# Altium PCB controller_V1.0.PcbDoc (part 1 of 8)
Units mm, origin at the board's own origin, x right, y up, seen from the top; angles counter-clockwise.
Board outline 284.13 x 175.13 mm, 4 copper layers (Top Layer, GND, VCC, Bottom Layer); 496 components, 415 nets, 1682 pads, 750 vias.
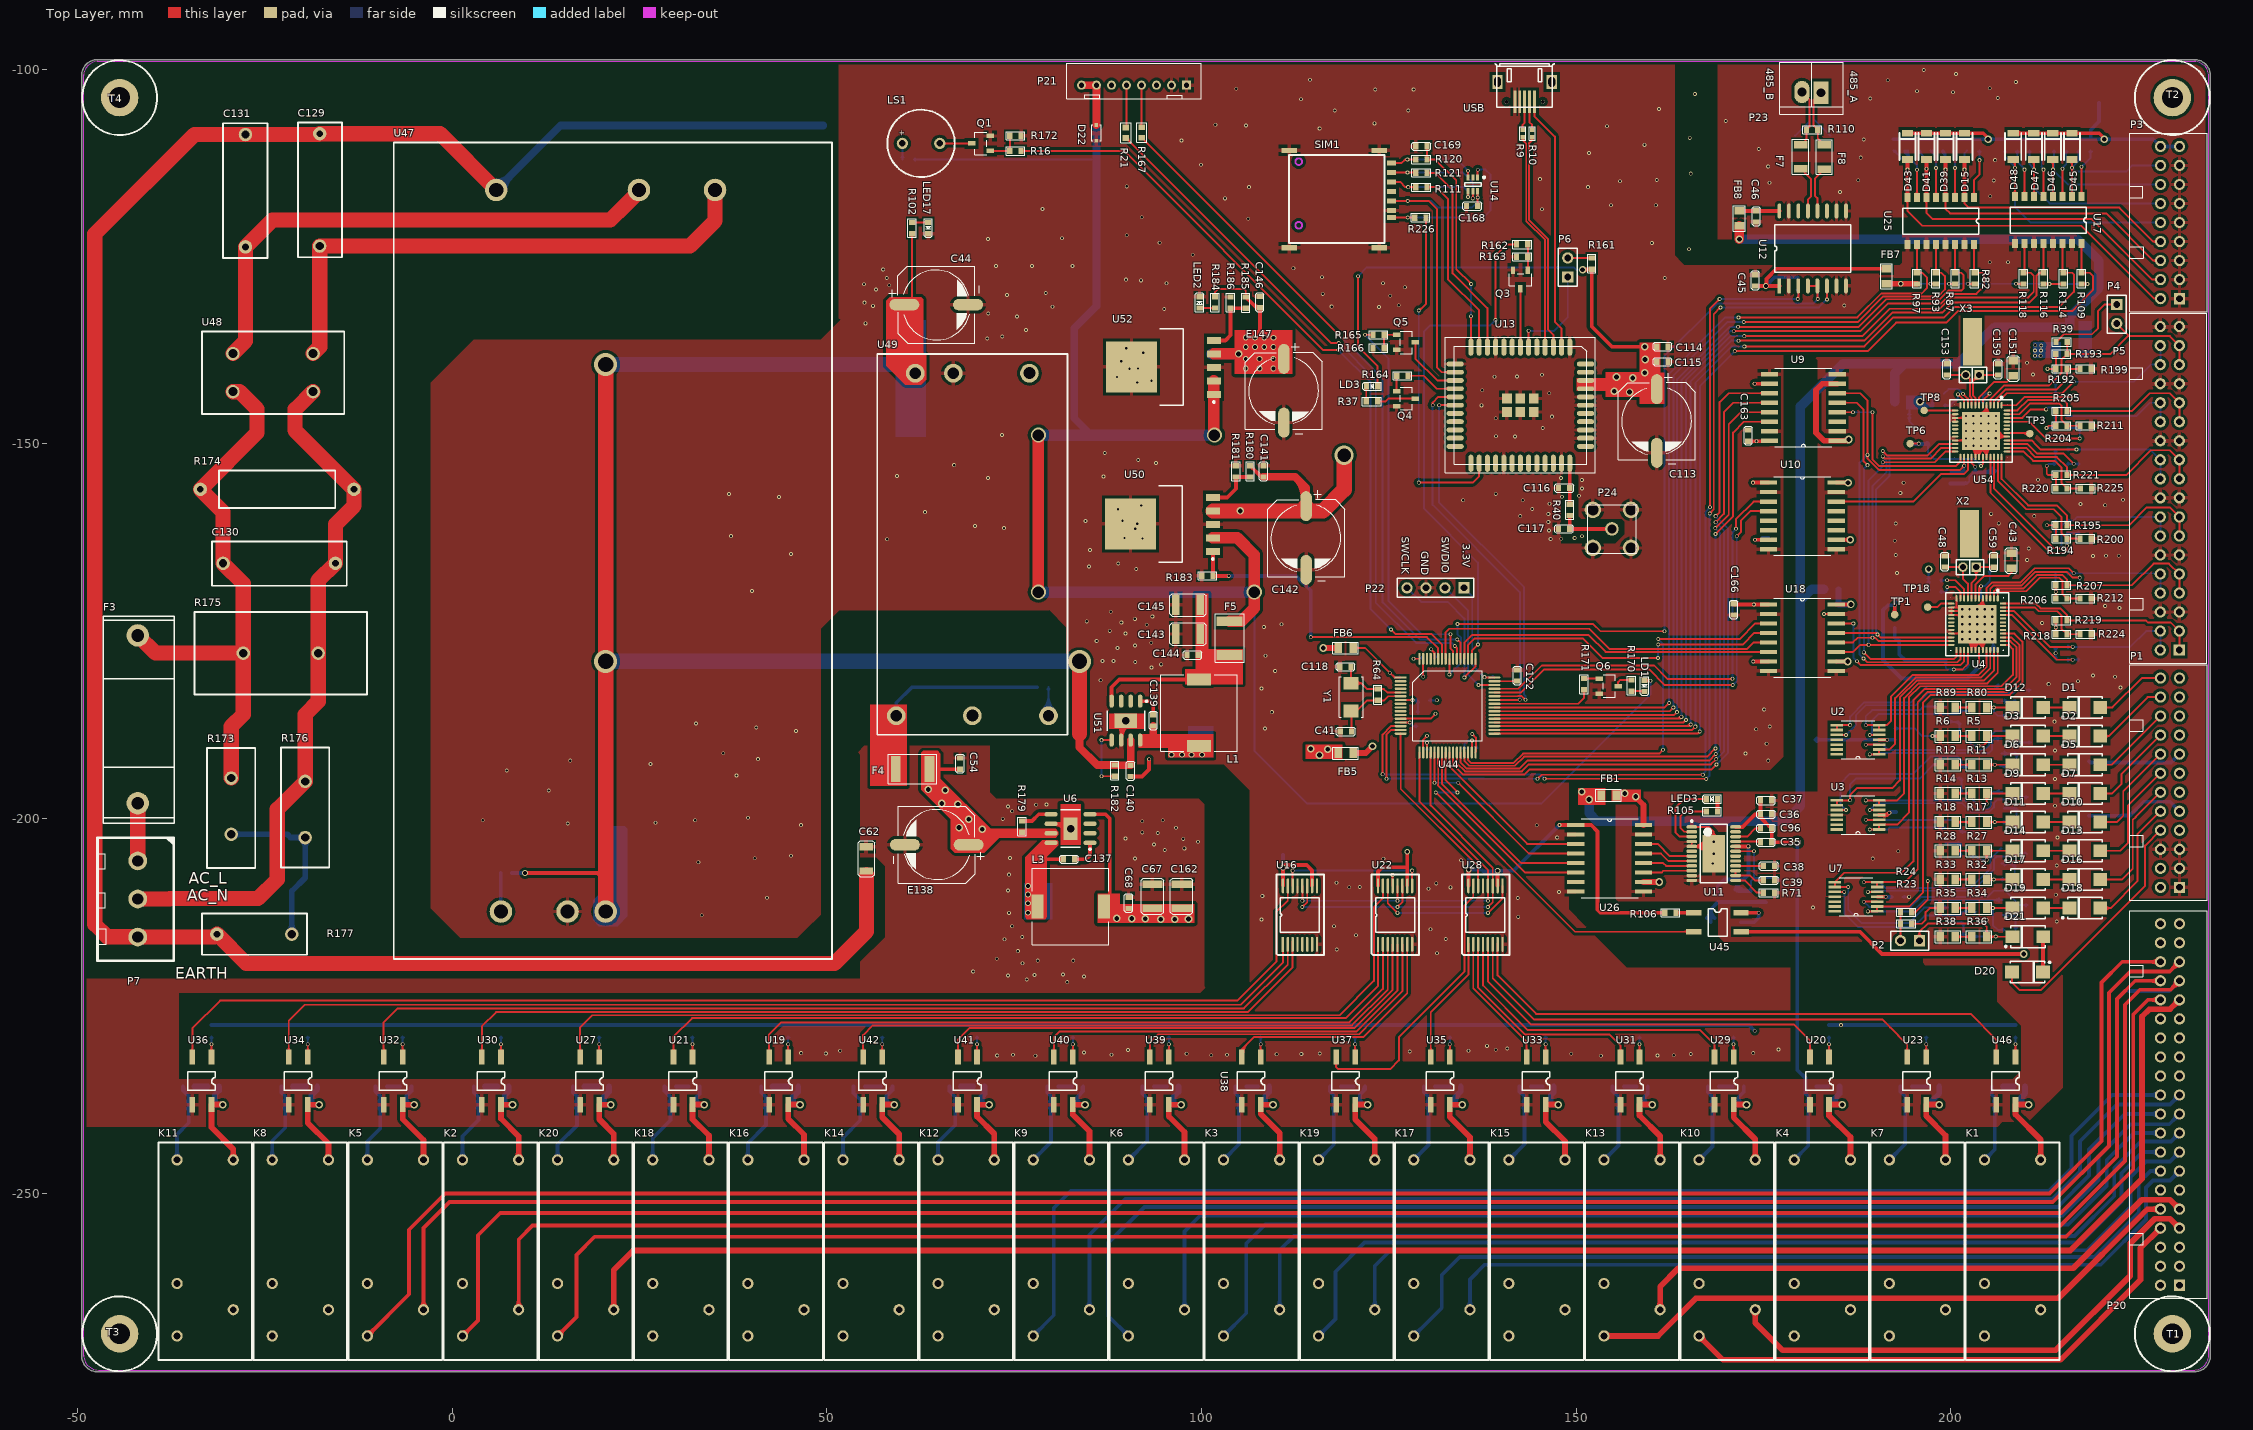
[diagram p0: Top Layer view]
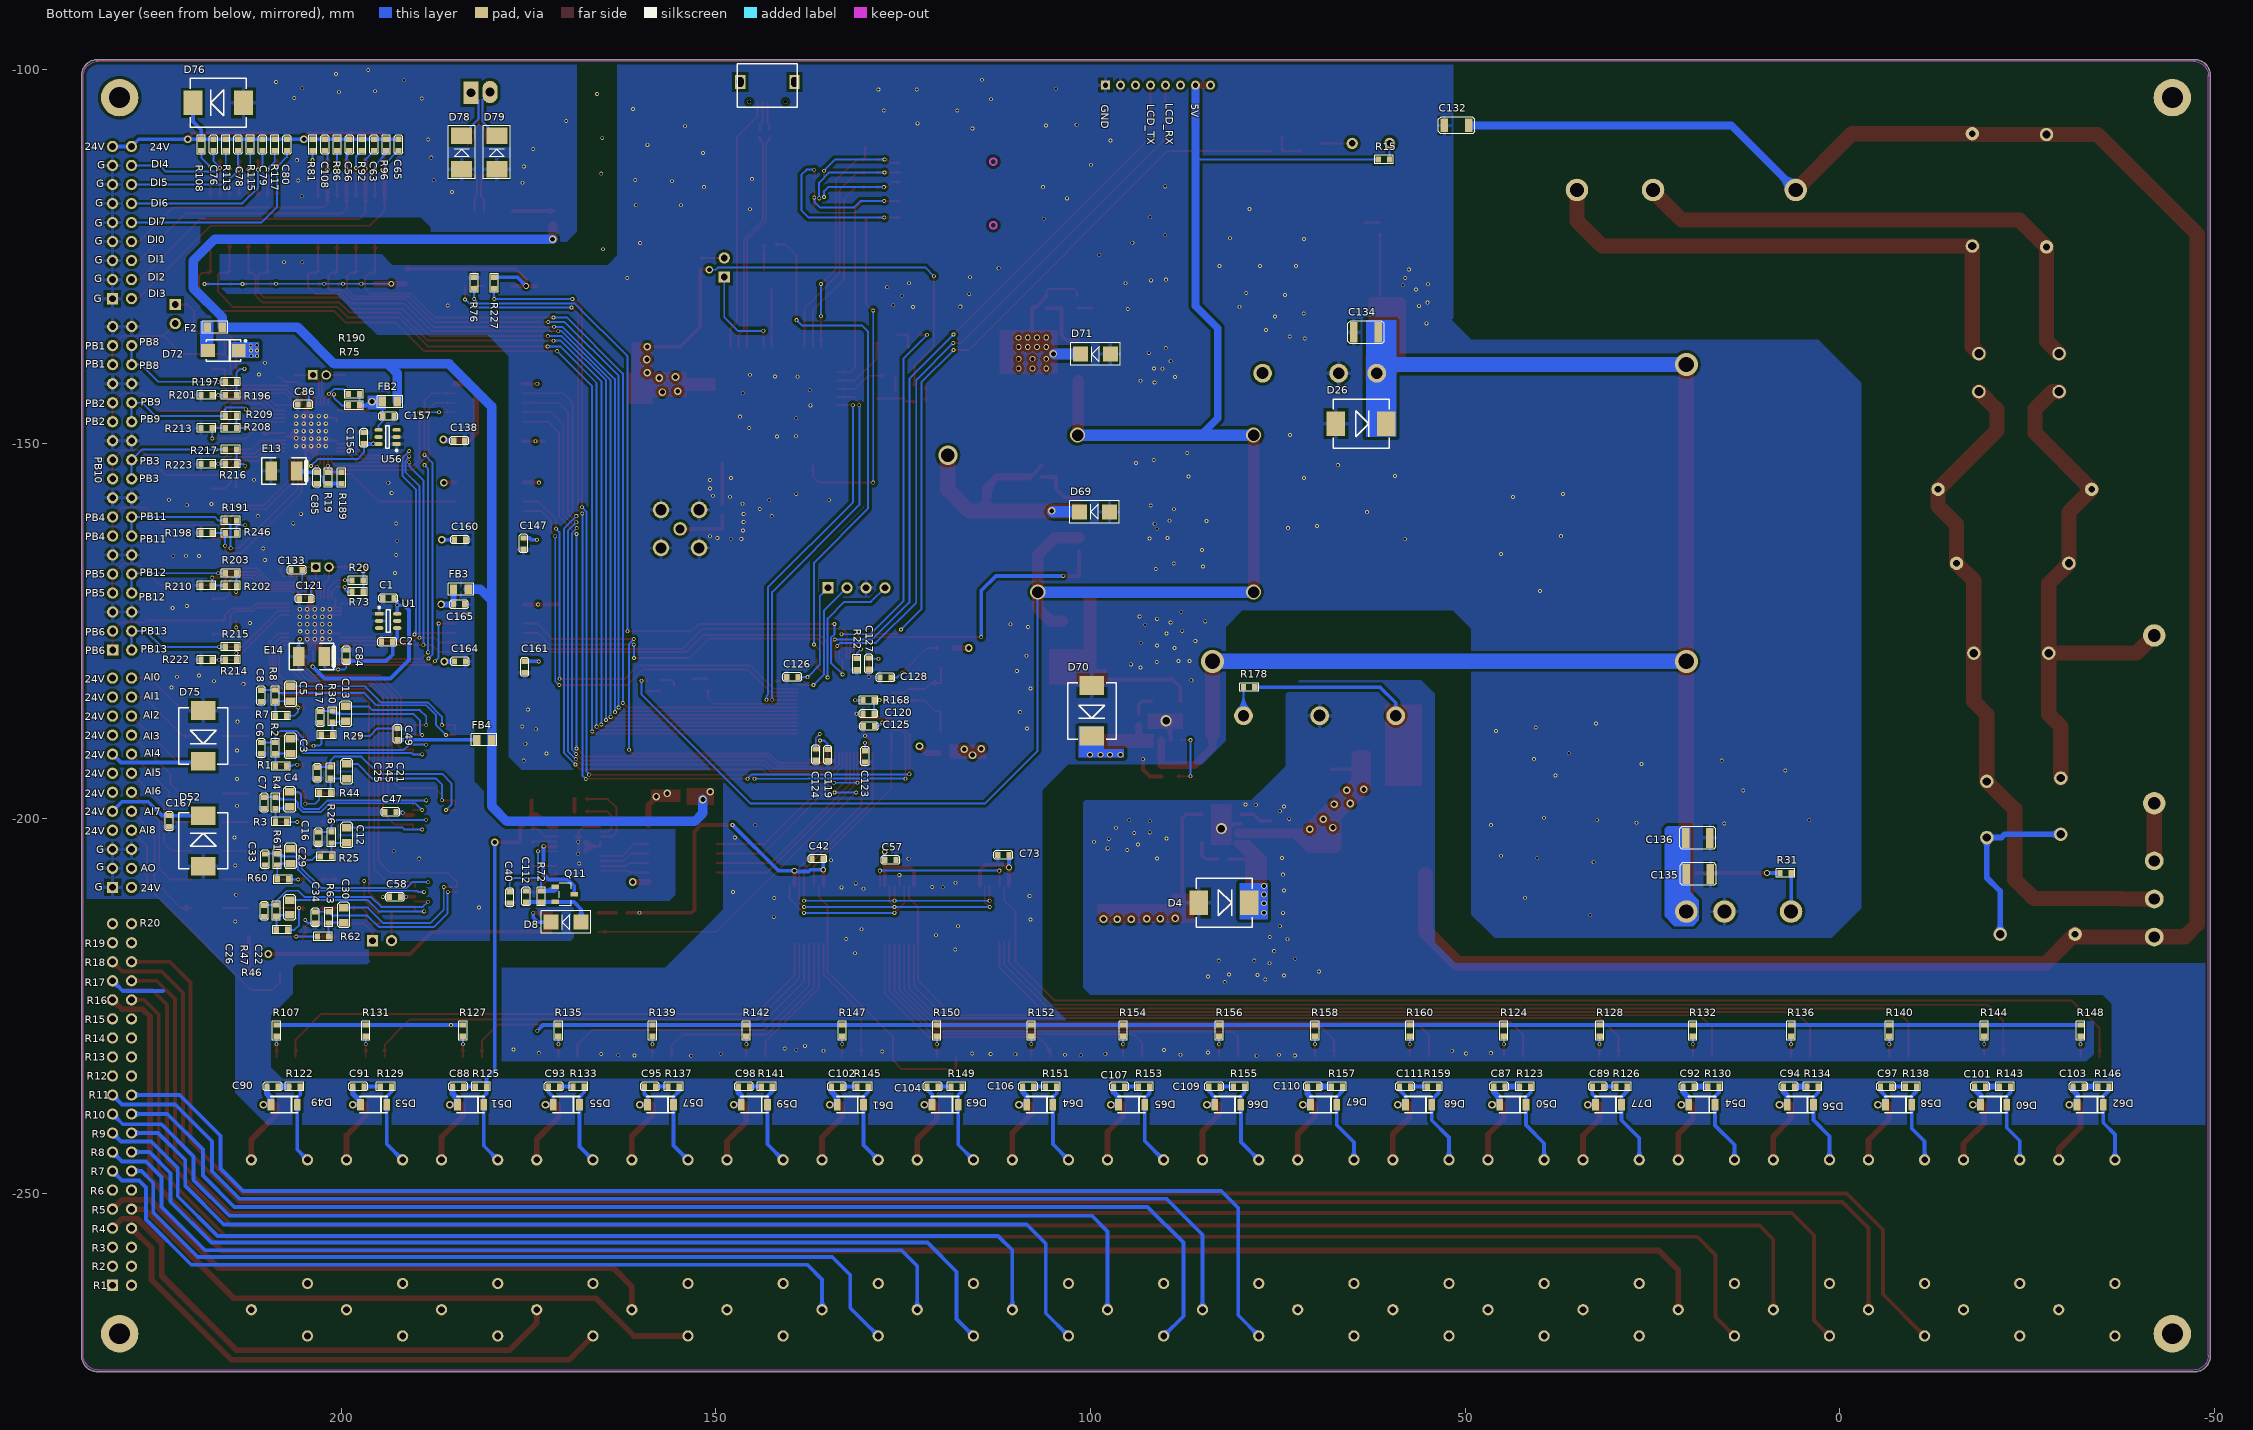
[diagram p1: Bottom Layer view, seen from below]
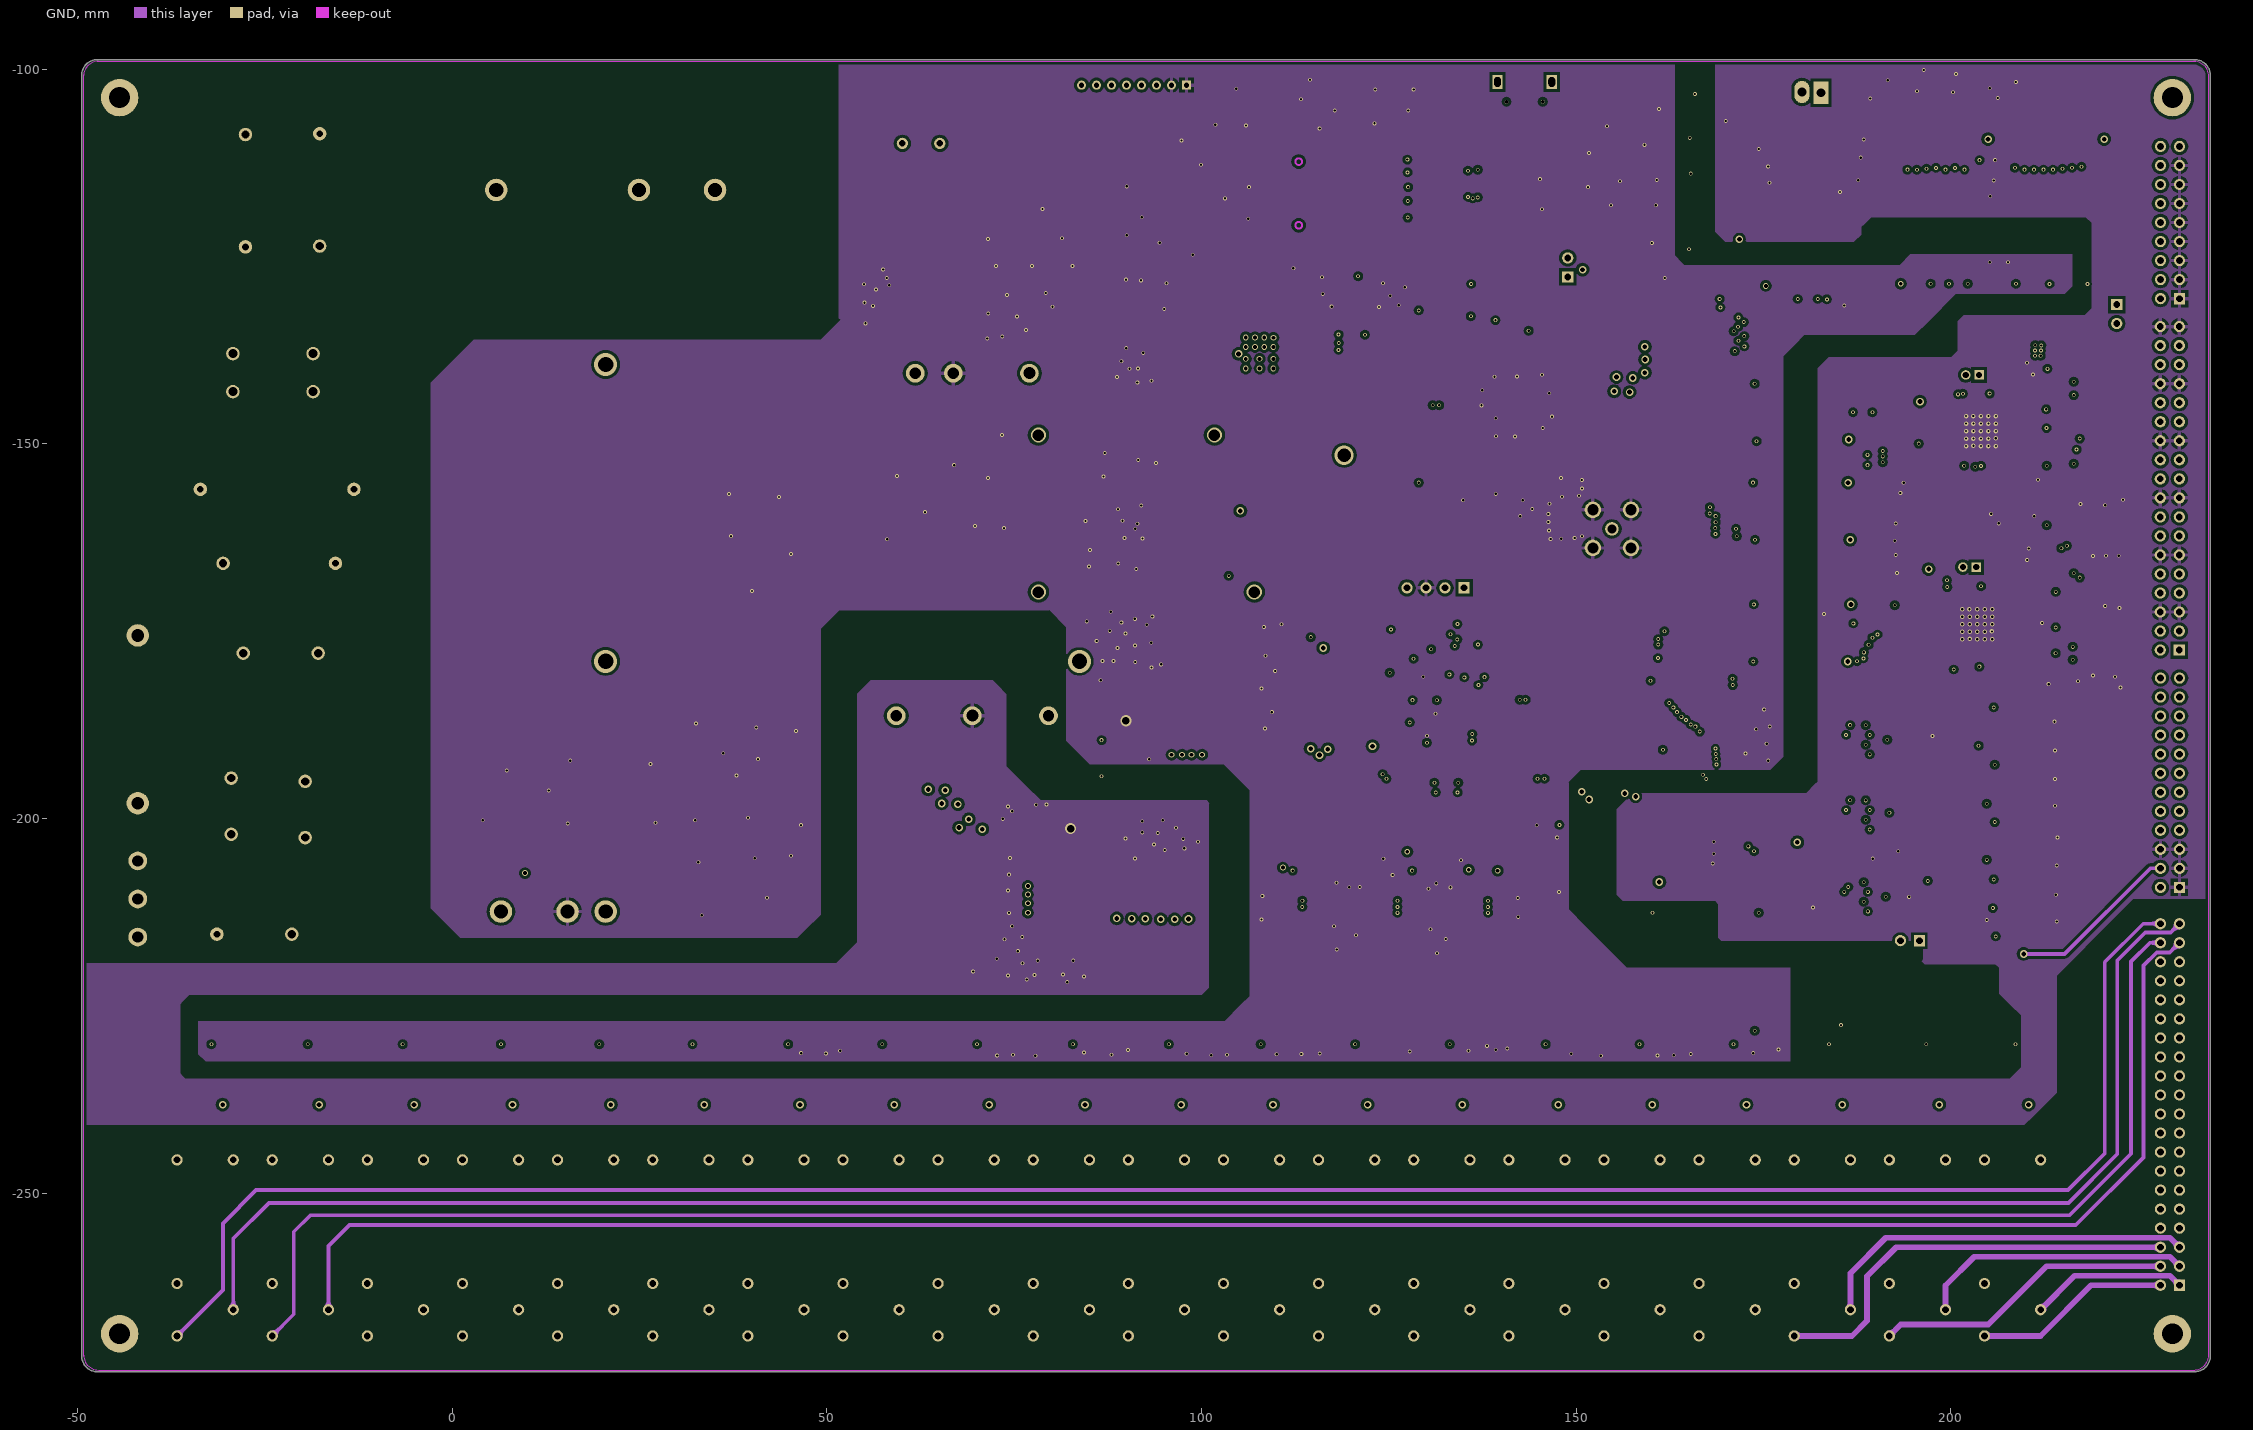
[diagram p2: GND]
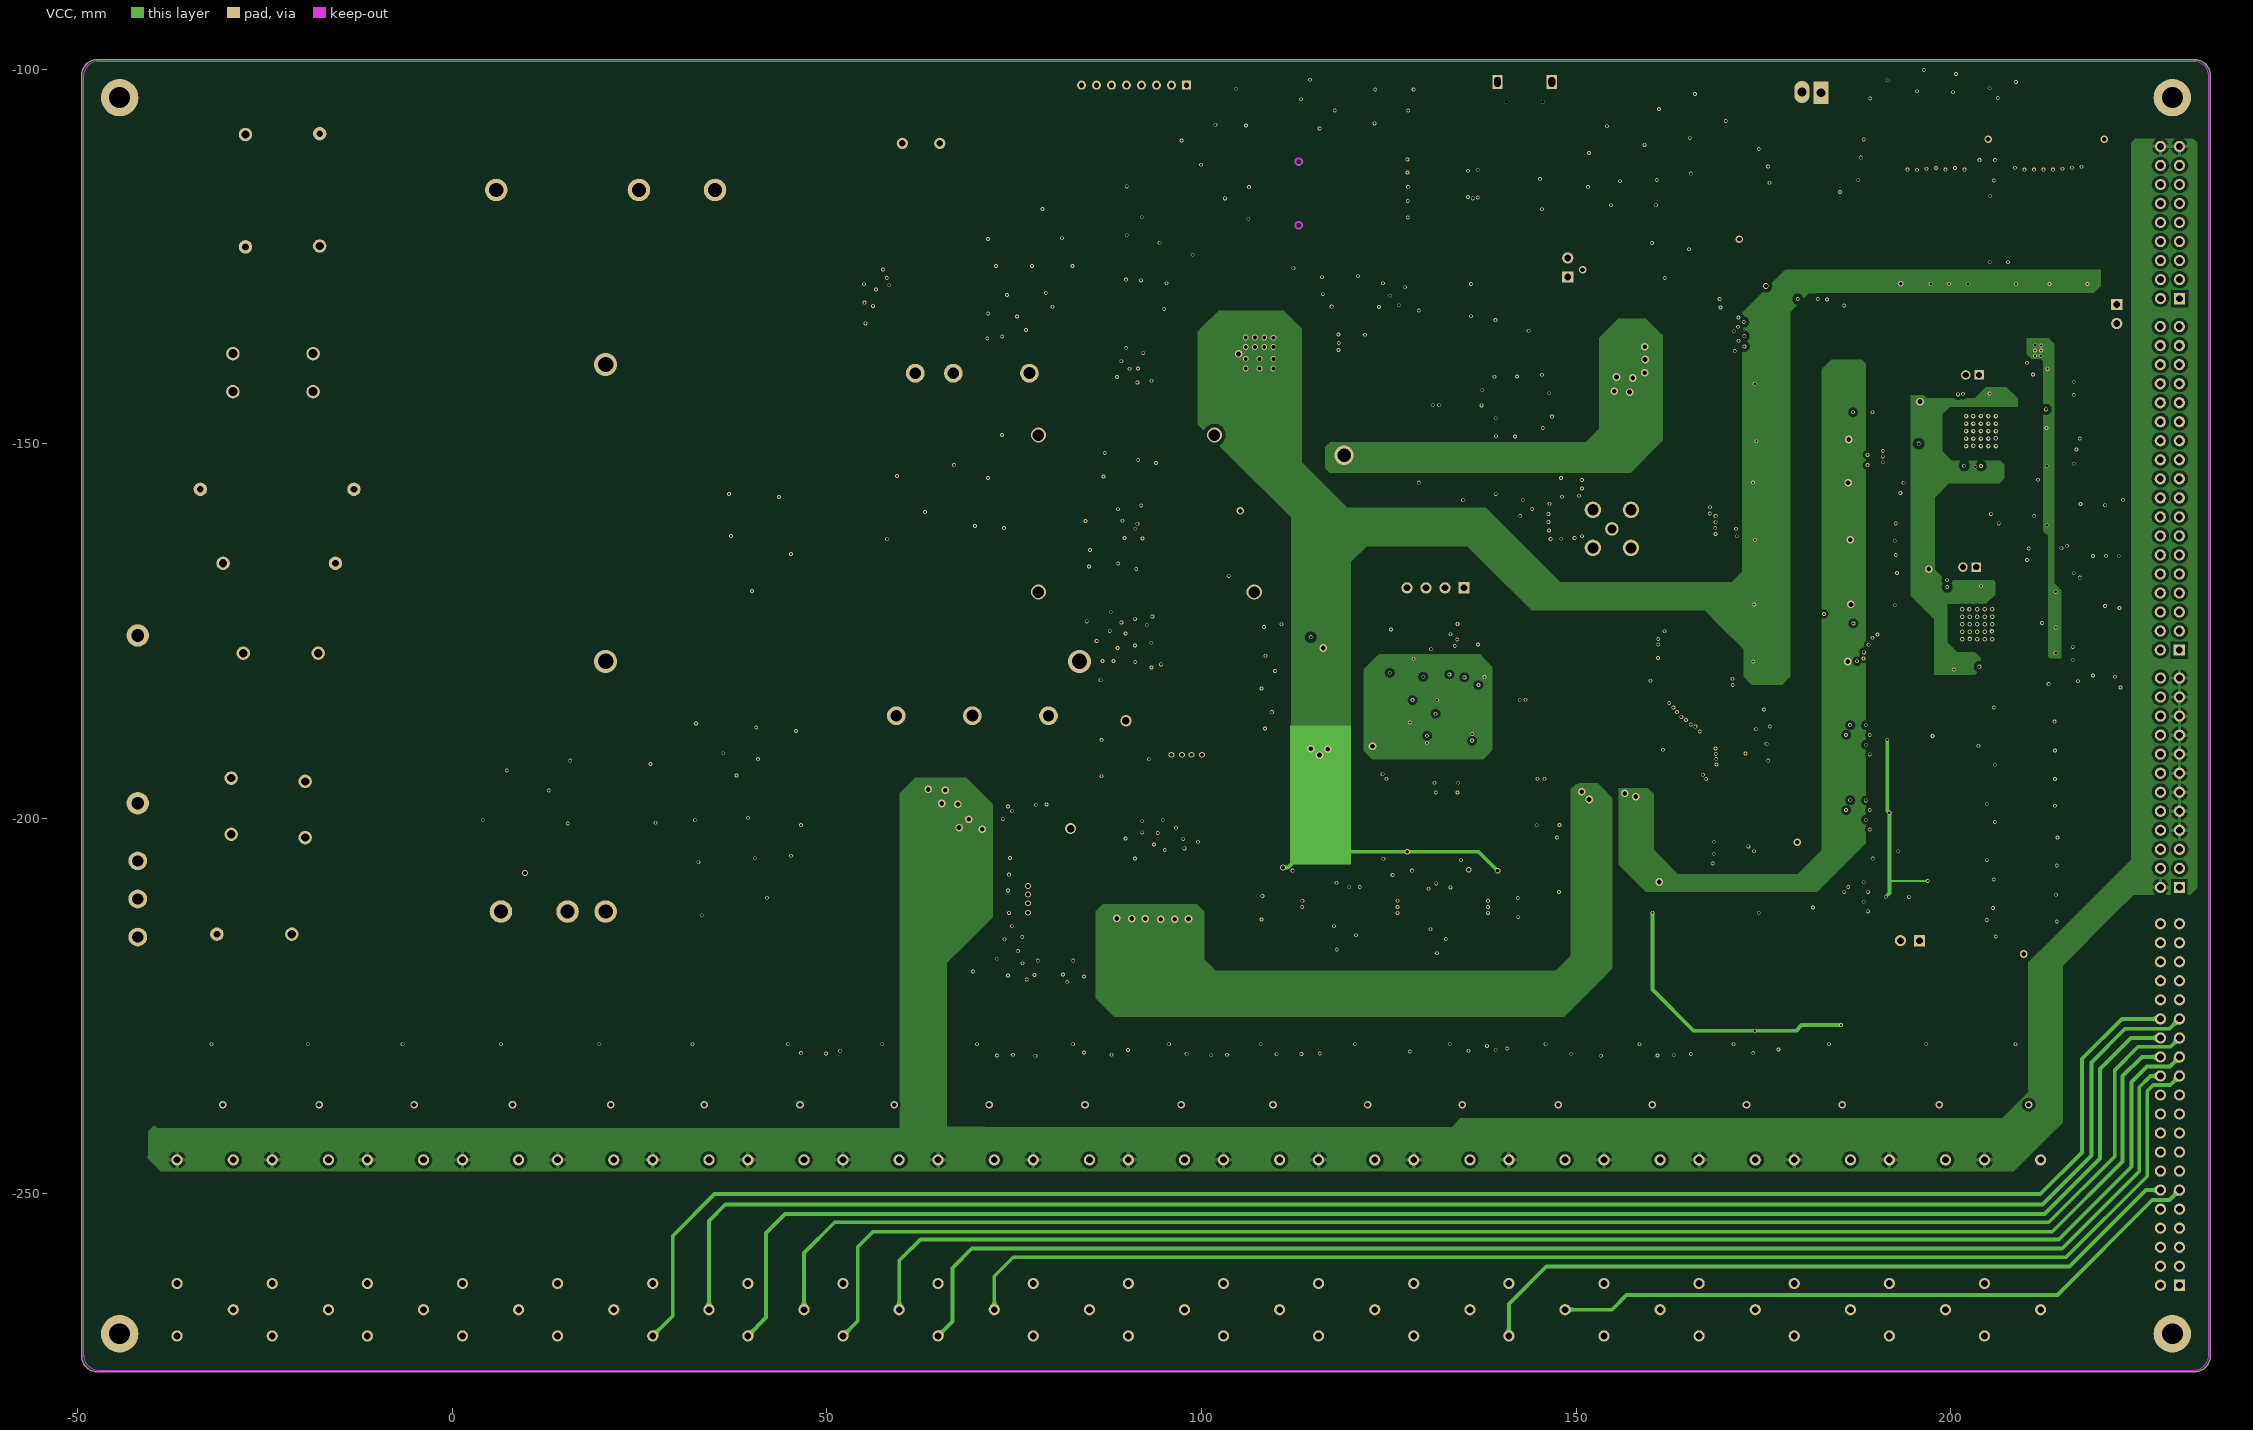
[diagram p3: VCC]

## Layer stack, top to bottom
Top Layer: signal copper 0.0356
Dielectric: core 0.32, FR-4, Dk 4.8
GND: signal copper 0.0356
Dielectric: prepreg 0.32, FR-4, Dk 4.8
VCC: signal copper 0.0356
Dielectric: core 0.32, FR-4, Dk 4.8
Bottom Layer: signal copper 0.0356

## Board outline
-47.678,-273.826 cw(c-47.406,-271.781) -49.469,-271.781 -49.469,-100.762 cw(c-49.406,-100.762) -49.469,-100.758 cw(c-47.406,-100.781) -47.428,-98.717 cw(c-47.424,-98.781) -47.424,-98.717 232.689,-98.717 cw(c232.689,-98.781) 232.709,-98.72 cw(c232.594,-100.781) 234.655,-100.666 cw(c234.594,-100.686) 234.658,-100.686 234.658,-271.781 cw(c232.594,-271.781) 232.594,-273.844 -47.634,-273.844 cw(c-47.634,-273.781)

## Design rules (kind name [scope] priority, off if disabled: settings)
Clearance [InPolygon] p1: gap=0.381
Clearance Clearance_1 [All] p2: gap=0.127
DiffPairsRouting [All] p1: maxlimit=0.254 minlimit=0.254 mostfreqgap=0.254 maxuncoupledlength=12.7
HoleToHoleClearance [All] p1: gap=0.127 allowstackedmicrovias=TRUE
MinimumSolderMaskSliver [All] p1: minsoldermaskwidth=0.127
PolygonConnect PolygonConnect_1 [IsVia] p1: connectstyle=Direct reliefconductorwidth=0.254 reliefentries=4 polygonreliefangle="90 Angle"
PolygonConnect [All] p2: connectstyle=Relief reliefconductorwidth=0.508 reliefentries=4 polygonreliefangle="90 Angle"
RoutingVias [All] p1: holewidth=0.254 width=0.508 viastyle="Through Hole" minholewidth=0.254 minwidth=0.508 maxholewidth=2.54 maxwidth=5.08
SilkToSilkClearance [All] p1: silktosilkclearance=0.127
SilkscreenOverComponentPads [All] p1: minsilkscreentomaskgap=0
SolderMaskExpansion [All] p1: expansion=0.102
Width [All] p1: maxlimit=5.08 minlimit=0.254 preferedwidth=0.254
23 further rules are at their usual default settings.

## Classes and differential pairs
component class rs485: C45 C46 D78 D79 F7 F8 FB7 FB8 P23 R76 R110 R227 U12
component class relay: K1 K2 K3 K4 K5 K6 K7 K8 K9 K10 K11 K12 K13 K14 K15 K16 K17 K18 K19 K20 P20
component class pt100: C151 C153 C156 C157 C159 D72 F2 P4 P5 R39 R75 R189 R190 R191 R192 R193 R194 R195 R196 R197 R198 R199 R200 R201 R202 R203 R204 R205 R206 R207 R208 R209 R210 R211 R212 R213 R214 R215 R216 R217 R218 R219 R220 R221 R222 R223 R224 R225 R246 TP3 TP6 TP8 U54 U56 X3
component class power: C44 C54 C62 C67 C68 C129 C130 C131 C132 C134 C135 C136 C137 C139 C140 C141 C142 C143 C144 C145 C146 C162 D4 D26 D69 D70 D71 E138 E147 F3 F4 F5 L1 L3 LED2 LED17 P7 R31 R102 R173 R174 R175 R176 R177 R178 R179 R180 R181 R182 R183 R184 R185 R186 T1 T2 T3 T4 U6 U47 U48 U49 U50 U51 U52
component class mcu: C41 C118 C119 C120 C122 C123 C124 C125 C126 C127 C128 D22 FB5 FB6 LD1 LS1 P21 P22 Q1 Q6 R15 R16 R21 R22 R64 R167 R168 R170 R171 R172 U44 Y1
component class LTE: C113 C114 C115 C116 C117 C168 C169 LD3 P6 P24 Q3 Q4 Q5 R9 R10 R37 R40 R111 R120 R121 R161 R162 R163 R164 R165 R166 R226 SIM1 U13 U14 USB
component class IO_ctrl: C42 C57 C73 U16 U22 U28
component class do: C87 C88 C89 C90 C91 C92 C93 C94 C95 C97 C98 C101 C102 C103 C104 C106 C107 C109 C110 C111 D49 D50 D51 D53 D54 D55 D56 D57 D58 D59 D60 D61 D62 D63 D64 D65 D66 D67 D68 D77 F1 R107 R122 R123 R124 R125 R126 R127 R128 R129 R130 R131 R132 R133 R134 R135 R136 R137 R138 R139 R140 R141 R142 R143 R144 R145 R146 R147 R148 R149 R150 R151 R152 R153 R154 R155 R156 R157 R158 R159 R160 U19 U20 U21 U23 U27 U29 U30 U31 U32 U33 U34 U35 U36 U37 U38 U39 U40 U41 U42 U46
component class di: C56 C63 C65 C76 C78 C79 C80 C108 D15 D39 D41 D43 D45 D46 D47 D48 D76 P3 R81 R82 R86 R87 R92 R93 R96 R97 R108 R109 R113 R114 R115 R116 R117 R118 U17 U25
component class ao: C35 C36 C37 C38 C39 C40 C96 C112 C165 C166 C167 D8 D75 FB3 LED3 Q11 R71 R72 R105 R106 U11 U26 U45
component class ai: C1 C2 C3 C4 C5 C6 C7 C8 C12 C13 C16 C17 C21 C22 C25 C26 C29 C30 C33 C34 C43 C47 C48 C49 C58 C59 C84 C85 C86 C121 C133 C138 C147 C160 C161 C163 C164 D1 D2 D3 D5 D6 D7 D9 D10 D11 D12 D13 D14 D16 D17 D18 D19 D20 D21 D52 E13 E14 FB1 FB2 FB4 P1 P2 R1 R2 R3 R4 R5 R6 R7 R8 R11 R12 R13 R14 R17 R18 R19 R20 R23 R24 R25 R26 R27 R28 R29 R30 R32 R33 R34 R35 R36 R38 R44 R45 R46 R47 R60 R61 R62 R63 R73 R80 R89 TP1 TP18 U1 U2 U3 U4 U7 U9 U10 U18 X2
differential pair MB_RX1: +MB_RX1_P -MB_RX1_N

## Components (designator, comment, footprint, x,y, rotation, side; value= is the part's Value field where it differs from the comment)
C1 "1uF" 0603C 192.987,-170.586 r0 bottom
C2 "0.1uF" 0603C 194.638,-176.428 r180 bottom
C3 "220nF" 0805C 206.781,-191.347 r90 bottom
C4 "220nF" 0805C 206.906,-198.45 r90 bottom
C5 "220nF" 0805C 206.781,-184.353 r90 bottom
C6 "0.1uF" 0603C 210.718,-191.364 r90 bottom
C7 "0.1uF" 0603C 210.309,-198.65 r90 bottom
C8 "0.1uF" 0603C 210.718,-184.379 r90 bottom
C12 "220nF" 0805C 199.288,-203.229 r90 bottom
C13 "220nF" 0805C 199.413,-187.029 r90 bottom
C16 "0.1uF" 0603C 203.098,-203.302 r90 bottom
C17 "0.1uF" 0603C 202.816,-187.229 r90 bottom
C21 "220nF" 0805C 199.288,-194.72 r90 bottom
C22 "220nF" 0805C 206.906,-212.881 r90 bottom
C25 "0.1uF" 0603C 203.225,-194.666 r90 bottom
C26 "0.1uF" 0603C 210.309,-213.081 r90 bottom
C29 "220nF" 0805C 206.779,-206.023 r90 bottom
C30 "220nF" 0805C 199.669,-213.897 r90 bottom
C33 "0.1uF" 0603C 210.182,-206.223 r90 bottom
C34 "0.1uF" 0603C 203.479,-213.97 r90 bottom
C35 "0.01uF" 0603C 174.621,-203.175 r0 top
C36 "0.01uF" 0603C 176.121,-199.449 r180 top
C37 "0.1uF" 0603C 176.121,-197.587 r180 top
C38 "0.1uF" 0603C 174.978,-206.35 r0 top
C39 "0.1uF" 0603C 174.978,-208.255 r0 top
C40 "0.1uF" 0603C 177.518,-211.279 r90 bottom
C41 "20p" 0603c 118.516,-188.392 r0 top
C42 "0.1uF" 0603C 135.687,-205.384 r0 bottom
C43 "22nF" 0805C 208.117,-166.573 r90 top
C44 "220uF/50V" Φ10×10 64.59,-131.42 r90 top
C45 "0.1uF" 0603C 173.937,-127.406 r270 top
C46 "0.1uF" 0603C 174.038,-120.371 r90 top
C47 "0.1uF" 0603C 194.208,-199.136 r180 bottom
C48 "4.7pF" 0603C 199.227,-166.446 r90 top
C49 "0.1uF" 0603C 192.507,-187.985 r270 bottom
C54 "1uF" 0603C 67.765,-191.922 r270 top
C56 "10nF/50V" 0603C 198.926,-109.322 r270 bottom
C57 "0.1uF" 0603C 127.457,-205.537 r180 bottom
C58 "0.1uF" 0603C 193.599,-210.464 r180 bottom
C59 "4.7pF" 0603C 205.765,-166.472 r90 top
C62 "1nF/2kV" 1206C 55.268,-203.759 r270 top
C63 "10nF/50V" 0603C 195.653,-109.322 r270 bottom
C65 "10nF/50V" 0603C 192.38,-109.322 r270 bottom
C67 "22uF/10V" 1210C 93.444,-212.014 r90 top
C68 "0.1uF" 0603C 90.269,-212.014 r90 top
C73 "0.1uF" 0603C 110.896,-204.876 r0 bottom
C76 "10nF/50V" 0603C 217.061,-109.322 r270 bottom
C78 "10nF/50V" 0603C 213.795,-109.322 r270 bottom
C79 "10nF/50V" 0603C 210.53,-109.322 r270 bottom
C80 "10nF/50V" 0603C 207.264,-109.322 r270 bottom
C84 "0.01uF" 0603C 199.354,-177.495 r270 bottom
C85 "0.1uF" 0603C 203.291,-155.27 r90 bottom
C86 "0.1uF" 0603C 205.831,-144.729 r180 bottom
C87 "0.1uF" 0603C 46.176,-235.788 r180 bottom
C88 "0.1uF" 0603C 185.162,-235.788 r180 bottom
C89 "0.1uF" 0603C 33.016,-235.788 r180 bottom
C90 "0.1uF" 0603C 209.919,-235.788 r180 bottom
C91 "0.1uF" 0603C 198.497,-235.788 r180 bottom
C92 "0.1uF" 0603C 20.926,-235.788 r180 bottom
C93 "0.1uF" 0603C 172.388,-235.788 r180 bottom
C94 "0.1uF" 0603C 7.54,-235.788 r180 bottom
C95 "0.1uF" 0603C 159.559,-235.788 r180 bottom
C96 "0.01uF" 0603C 174.621,-201.312 r0 top
C97 "0.1uF" 0603C -5.463,-235.788 r180 bottom
C98 "0.1uF" 0603C 147.017,-235.788 r180 bottom
C101 "0.1uF" 0603C -18.012,-235.788 r180 bottom
C102 "0.1uF" 0603C 134.591,-235.788 r180 bottom
C103 "0.1uF" 0603C -31.143,-235.788 r180 bottom
C104 "0.1uF" 0603C 121.815,-235.788 r180 bottom
C106 "0.1uF" 0603C 109.064,-235.788 r180 bottom
C107 "0.1uF" 0603C 96.923,-235.788 r180 bottom
C108 "10nF/50V" 0603C 202.199,-109.322 r270 bottom
C109 "0.1uF" 0603C 84.223,-235.788 r180 bottom
C110 "0.1uF" 0603C 71.04,-235.788 r180 bottom
C111 "0.1uF" 0603C 58.747,-235.788 r180 bottom
C112 "0.01uF" 0603C 175.359,-209.676 r270 bottom
C113 "220uF/50V" Φ10×10 160.779,-146.939 r0 top
C114 "100nF/50V" 0603C 162.278,-137.008 r180 top
C115 "33pF/50V" 0603C 162.278,-139.04 r180 top
C116 "NC" 0603c 149.172,-155.88 r180 top
C117 "NC" 0603c 149.149,-161.341 r180 top
C118 "20p" 0603c 118.466,-179.756 r0 top
C119 "2.2uF/50V" 0603C 135.091,-192.292 r90 bottom
C120 "0.1uF/50V" 0603C 130.378,-186.03 r180 bottom
C121 "0.1uF" 0603C 205.638,-170.663 r180 bottom
C122 "2.2uF/50V" 0603C 142.164,-180.162 r270 top
C123 "0.1uF/50V" 0603C 130.099,-192.456 r90 bottom
C124 "0.1uF/50V" 0603C 136.677,-192.227 r90 bottom
C125 "0.1uF/50V" 0603C 130.325,-187.681 r180 bottom
C126 "0.1uF/50V" 0603C 140.564,-181.127 r180 bottom
C127 "0.1uF/50V" 0603C 129.614,-180.086 r90 bottom
C128 "0.1uF/50V" 0603C 128.115,-181.178 r180 bottom
C129 "2.2nF/400VAC" 15x18 -17.706,-108.585 r270 top
C130 "0.15μF/300VAC" 15x18 -15.598,-165.938 r180 top
C131 "2.2nF/400VAC" 15x18 -27.612,-123.698 r90 top
C132 "1nF/2KV" 1206C 52.756,-107.493 r180 bottom
C133 "0.1uF" 0603C 206.72,-166.827 r180 bottom
C134 "1uF/50V" 1210C 64.844,-135.103 r180 bottom
C135 "4.7uF/50V" 1210C 17.244,-207.416 r0 bottom
C136 "10uF/50V" 1210C 17.321,-202.59 r0 bottom
C137 "0.01uF" 0603C 81.557,-205.435 r0 top
C138 "0.1uF" 0603C 183.515,-149.581 r0 bottom
C139 "0.01uF" 0603C 93.571,-187.655 r90 top
C140 "1uF" 0603C 90.523,-194.386 r90 top
C141 "0.1uF/50V" 0603C 108.278,-152.907 r270 top
C142 "470uF/50V" Φ10×10 113.967,-162.56 r0 top
C143 "22uF/10V" 1210C 99.819,-175.381 r180 top
C144 "0.1uF" 0603C 99.565,-178.175 r180 top
C145 "22uF/10V" 1210C 99.819,-171.475 r180 top
C146 "0.1uF/50V" 0603C 107.795,-130.327 r270 top
C147 "0.1uF" 0603C 175.689,-164.059 r90 bottom
C151 "22nF" 0805C 208.371,-140.919 r90 top
C153 "4.7pF" 0603C 199.481,-140.792 r90 top
C156 "1uF" 0603C 197.002,-149.962 r90 bottom
C157 "0.1uF" 0603C 192.991,-146.304 r0 bottom
C159 "4.7pF" 0603C 206.339,-140.792 r90 top
C160 "0.1uF" 0603C 183.413,-162.789 r0 bottom
C161 "0.1uF" 0603C 175.539,-180.518 r90 bottom
C162 "22uF/10V" 1210C 97.356,-212.014 r90 top
C163 "0.1uF" 0603C 172.974,-148.133 r270 top
C164 "0.1uF" 0603C 183.413,-179.045 r0 bottom
C165 "0.1uF" 0603C 183.54,-171.425 r0 bottom
C166 "0.1uF" 0603C 171.041,-172.847 r90 top
C167 "0.1uF" 0603C 222.961,-201.117 r90 bottom
C168 "0.1uF/10V" 0603c 135.382,-118.237 r0 top
C169 "0.1uF/10V" 0603c 130.099,-110.261 r180 top
D1 "SS14" DO-214AC 217.929,-185.174 r180 top
D2 "SS14" DO-214AC 217.929,-189 r180 top
D3 "SS14" DO-214AC 210.309,-189 r180 top
D4 "SS54" SMC 85.57,-211.252 r180 bottom
D5 "SS14" DO-214AC 217.929,-192.826 r180 top
D6 "SS14" DO-214AC 210.309,-192.826 r180 top
D7 "SS14" DO-214AC 217.929,-196.652 r180 top
D8 "SS36" sma 167.993,-213.843 r0 bottom
D9 "SS14" DO-214AC 210.309,-196.652 r180 top
D10 "SS14" DO-214AC 217.929,-200.478 r180 top
D11 "SS14" DO-214AC 210.309,-200.478 r180 top
D12 "SS14" DO-214AC 210.309,-185.174 r180 top
D13 "SS14" DO-214AC 217.929,-204.304 r180 top
D14 "SS14" DO-214AC 210.309,-204.304 r180 top
D15 "LL4148" DO-213AB/LL34/MiniMELF 201.854,-110.287 r270 top
D16 "SS14" DO-214AC 217.929,-208.13 r180 top
D17 "SS14" DO-214AC 210.309,-208.13 r180 top
D18 "SS14" DO-214AC 217.929,-211.956 r180 top
D19 "SS14" DO-214AC 210.309,-211.956 r180 top
D20 "SS14" DO-214AC 210.261,-220.497 r0 top
D21 "SS14" DO-214AC 210.309,-215.781 r180 top
D22 "CESDB5V0D5" sod323 85.951,-109.525 r90 top
D26 "SMCJ30CA" SMC 67.257,-147.295 r180 bottom
D39 "LL4148" DO-213AB/LL34/MiniMELF 199.314,-110.287 r270 top
D41 "LL4148" DO-213AB/LL34/MiniMELF 196.774,-110.287 r270 top
D43 "LL4148" DO-213AB/LL34/MiniMELF 194.234,-110.287 r270 top
D45 "LL4148" DO-213AB/LL34/MiniMELF 216.186,-110.287 r270 top
D46 "LL4148" DO-213AB/LL34/MiniMELF 213.644,-110.287 r270 top
D47 "LL4148" DO-213AB/LL34/MiniMELF 211.101,-110.287 r270 top
D48 "LL4148" DO-213AB/LL34/MiniMELF 208.347,-110.287 r270 top
D49 "LL4148" DO-213AB/LL34/MiniMELF 207.633,-238.201 r0 bottom
D50 "LL4148" DO-213AB/LL34/MiniMELF 43.636,-238.201 r0 bottom
D51 "LL4148" DO-213AB/LL34/MiniMELF 182.749,-238.201 r0 bottom
D52 "SMCJ36CA" SMC 218.437,-206.383 r90 bottom
D53 "LL4148" DO-213AB/LL34/MiniMELF 195.703,-238.201 r0 bottom
D54 "LL4148" DO-213AB/LL34/MiniMELF 18.386,-238.201 r0 bottom
D55 "LL4148" DO-213AB/LL34/MiniMELF 169.975,-238.201 r0 bottom
D56 "LL4148" DO-213AB/LL34/MiniMELF 5.254,-238.201 r0 bottom
D57 "LL4148" DO-213AB/LL34/MiniMELF 157.4,-238.201 r0 bottom
D58 "LL4148" DO-213AB/LL34/MiniMELF -7.876,-238.201 r0 bottom
D59 "LL4148" DO-213AB/LL34/MiniMELF 144.858,-238.201 r0 bottom
D60 "LL4148" DO-213AB/LL34/MiniMELF -20.552,-238.201 r0 bottom
D61 "LL4148" DO-213AB/LL34/MiniMELF 132.051,-238.201 r0 bottom
D62 "LL4148" DO-213AB/LL34/MiniMELF -33.429,-238.201 r0 bottom
D63 "LL4148" DO-213AB/LL34/MiniMELF 119.402,-238.201 r0 bottom
D64 "LL4148" DO-213AB/LL34/MiniMELF 106.778,-238.201 r0 bottom
D65 "LL4148" DO-213AB/LL34/MiniMELF 94.51,-238.201 r0 bottom
D66 "LL4148" DO-213AB/LL34/MiniMELF 81.683,-238.201 r0 bottom
D67 "LL4148" DO-213AB/LL34/MiniMELF 68.881,-238.201 r0 bottom
D68 "LL4148" DO-213AB/LL34/MiniMELF 56.207,-238.201 r0 bottom
D69 "5.1V" SMA 97.457,-159.08 r0 bottom
D70 "SS54" SMC 99.819,-182.239 r270 bottom
D71 "5.1V" SMA 97.358,-137.998 r0 bottom
D72 "SS14" DO-214AC 215.745,-137.541 r180 bottom
D75 "SMCJ36CA" SMC 218.44,-185.598 r270 bottom
D76 "SMCJ36CA" smc 213.055,-104.47 r0 bottom
D77 "LL4148" DO-213AB/LL34/MiniMELF 30.857,-238.201 r0 bottom
D78 "SMBJ6.5A" SMB 183.944,-113.335 r90 bottom
D79 "SMBJ6.5A" SMB 179.245,-113.335 r90 bottom
E13 "10uF/16V" C3528 205.958,-153.619 r0 bottom
E14 "10uF/16V" C3528 202.275,-178.384 r0 bottom
E138 "100uF/50V" Φ10×10 64.666,-203.505 r270 top
E147 "47uF/50V" Φ10×10 110.995,-142.9 r0 top
F2 "1A" 0805r 215.872,-134.417 r0 bottom
F3 "6.3A/250V" 可视开关电源保险丝座 -41.989,-197.968 r90 top
F4 "2A" 1812-F 59.179,-193.396 r0 top
F5 "3A" 1812-F 103.756,-178.175 r90 top
F7 "SMD1210P020TS" 1206R 179.982,-113.284 r90 top
F8 "SMD1210P020TS" 1206R 183.131,-113.335 r90 top
FB1 "JWWBW2012 M600HT" 0805R 153.337,-196.926 r0 top
FB2 "JWWBW2012 M600HT" 0805R 192.532,-144.348 r0 bottom
FB3 "JWWBW2012 M600HT" 0805R 183.032,-169.393 r0 bottom
FB4 "JWWBW2012 M600HT" 0805R 179.959,-189.509 r0 bottom
FB5 "JWWBW2012 M600HT" 0805R 118.237,-191.262 r0 top
FB6 "JWWBW2012 M600HT" 0805R 118.237,-177.241 r0 top
FB7 "JWWBW2012 M600HT" 0805CZ 191.44,-126.619 r270 top
FB8 "JWWBW2012 M600HT" 0805CZ 171.803,-118.897 r270 top
K1 "G2RL-1-H" G2RL-1-H 212.019,-245.567 r270 top locked
K2 "G2RL-1-H" G2RL-1-H 8.855,-245.567 r270 top locked
K3 "G2RL-1-H" G2RL-1-H 110.437,-245.567 r270 top locked
K4 "G2RL-1-H" G2RL-1-H 186.623,-245.567 r270 top locked
K5 "G2RL-1-H" G2RL-1-H -3.843,-245.567 r270 top locked
K6 "G2RL-1-H" G2RL-1-H 97.739,-245.567 r270 top locked
K7 "G2RL-1-H" G2RL-1-H 199.321,-245.567 r270 top locked
K8 "G2RL-1-H" G2RL-1-H -16.54,-245.567 r270 top locked
K9 "G2RL-1-H" G2RL-1-H 85.042,-245.567 r270 top locked
K10 "G2RL-1-H" G2RL-1-H 173.926,-245.567 r270 top locked
K11 "G2RL-1-H" G2RL-1-H -29.238,-245.567 r270 top locked
K12 "G2RL-1-H" G2RL-1-H 72.344,-245.567 r270 top locked
K13 "G2RL-1-H" G2RL-1-H 161.228,-245.567 r270 top locked
K14 "G2RL-1-H" G2RL-1-H 59.646,-245.567 r270 top locked
K15 "G2RL-1-H" G2RL-1-H 148.53,-245.567 r270 top locked
K16 "G2RL-1-H" G2RL-1-H 46.948,-245.567 r270 top locked
K17 "G2RL-1-H" G2RL-1-H 135.832,-245.567 r270 top locked
K18 "G2RL-1-H" G2RL-1-H 34.251,-245.567 r270 top locked
K19 "G2RL-1-H" G2RL-1-H 123.135,-245.567 r270 top locked
K20 "G2RL-1-H" G2RL-1-H 21.553,-245.567 r270 top locked
L1 "CDRH105NP-100NC" CDRH105 104.772,-191.002 r180 top
L3 "CDRH105NP-100NC" CDRH105 77.442,-216.84 r90 top
LD1 "LED_Green_19-217" 0603led 159.131,-181.559 r270 top
LD3 "LED_Green_19-217" 0603led 123.518,-142.291 r180 top
LED2 "5V" 0603LED 99.746,-131.851 r90 top
LED3 "LED" 0603LED 168.882,-197.409 r180 top
LED17 "5V" 0603LED 63.528,-120.43 r270 top
LS1 "Speaker" BUFFER_0905 60.068,-109.88 r0 top
P1 "Header 12X2" XH2.54_2X12 230.546,-209.194 r90 top
P2 "Header 2" HDR1X2 195.834,-216.306 r180 top
P3 "Header 9X2" XH2.54_2X9 230.556,-130.607 r90 top locked
P4 "Header 2" HDR1X2 222.174,-131.394 r270 top
P5 "Header 18X2" XH2.54_2X18 230.53,-177.521 r90 top
P6 "Header 2" HDR1X2 148.892,-127.711 r90 top
P7 "Header 3" KF128V-3P -41.986,-205.664 r270 top
P20 "Header 20X2" XH2.54_2X20 230.546,-262.306 r90 top
P21 "Header 8" 2.0x8 97.991,-102.108 r180 top
P22 "Header 4" HDR1X4 135.049,-169.215 r180 top
P23 "Header 2" 2X2.54MMZ 182.7,-103.124 r180 top
P24 "Header 5" KH-SMA-KE-Z 154.788,-161.341 r0 top
Q1 "MMBT3904" SOT23-3 71.806,-110.896 r0 top
Q3 "MMBT3904" SOT23-3 143.584,-126.797 r90 top
Q4 "MMBT3904" SOT23-3 126.035,-142.951 r180 top
Q5 "MMBT3904" SOT23-3 126.058,-135.433 r180 top
Q6 "MMBT3904" SOT23-3 153.111,-181.331 r180 top
Q11 "MMBT3904" SOT23-3 171.422,-209.144 r0 bottom
R1 "51K" 0603R#1 208.813,-193.015 r180 bottom
R2 "51K" 0603R#1 208.813,-189.84 r270 bottom
R3 "51K" 0603R#1 208.785,-200.414 r180 bottom
R4 "51K" 0603R#1 208.785,-197.15 r270 bottom
R5 "49.9R_1%" 0805R 202.816,-189 r0 top
R6 "49.9R_1%" 0805R 198.625,-189 r0 top
R7 "51K" 0603R#1 208.813,-186.284 r180 bottom
R8 "51K" 0603R#1 208.813,-182.855 r270 bottom
R9 "22" 0402R 142.875,-108.093 r270 top
R10 "22" 0402R 144.145,-108.093 r270 top
R11 "49.9R_1%" 0805R 202.816,-192.826 r0 top
R12 "49.9R_1%" 0805R 198.625,-192.826 r0 top
R13 "49.9R_1%" 0805R 202.816,-196.652 r0 top
R14 "49.9R_1%" 0805R 198.625,-196.652 r0 top
R15 "100" 0603R#1 61.592,-112.039 r180 bottom
R16 "1K" 0603r 74.422,-110.896 r0 top
R17 "49.9R_1%" 0805R 202.816,-200.478 r0 top
R18 "49.9R_1%" 0805R 198.625,-200.478 r0 top
R19 "5.1K" 0603R#1 201.767,-155.27 r90 bottom
R20 "1.5K" 0603R#1 197.068,-168.224 r0 bottom
R21 "1K" 0603R#2 89.913,-108.458 r90 top
R22 "100K" 0603R#1 131.191,-178.638 r270 bottom
R23 "51K" 0603R#1 194.818,-214.046 r180 top
R24 "51K" 0603R#1 193.319,-212.522 r0 top
R25 "51K" 0603R#1 201.32,-205.08 r0 bottom
R26 "51K" 0603R#1 201.32,-201.778 r270 bottom
R27 "49.9R_1%" 0805R 202.816,-204.304 r0 top
R28 "49.9R_1%" 0805R 198.625,-204.304 r0 top
R29 "51K" 0603R#1 201.193,-188.824 r0 bottom
R30 "51K" 0603R#1 201.193,-185.649 r270 bottom
R31 "NC" 0603r 6.474,-207.289 r0 bottom
R32 "49.9R_1%" 0805R 202.816,-208.13 r0 top
R33 "49.9R_1%" 0805R 198.625,-208.13 r0 top
R34 "49.9R_1%" 0805R 202.816,-211.956 r0 top
R35 "49.9R_1%" 0805R 198.625,-211.956 r0 top
R36 "49.9R_1%" 0805R 202.816,-215.781 r0 top
R37 "1K" 0603R#1 121.994,-144.323 r0 top
R38 "49.9R_1%" 0805R 198.625,-215.781 r0 top
R39 "100" 0603R#1 215.57,-136.398 r180 top
R40 "0" 0603r 149.146,-158.039 r270 top
R44 "51K" 0603R#1 201.447,-196.571 r0 bottom
R45 "51K" 0603R#1 201.447,-193.142 r270 bottom
R46 "51K" 0603R#1 208.686,-214.859 r180 bottom
R47 "51K" 0603R#1 208.686,-211.557 r270 bottom
R60 "51K" 0603R#1 208.559,-208.128 r180 bottom
R61 "51K" 0603R#1 208.559,-204.699 r270 bottom
R62 "51K" 0603R#1 201.701,-215.748 r0 bottom
R63 "51K" 0603R#1 201.701,-212.446 r270 bottom
R64 "1M" 0603R#1 123.543,-184.226 r90 top
R71 "15K/0.1%" 0603R#1 174.978,-209.906 r0 top
R72 "1K" 0603R#1 173.327,-209.676 r270 bottom
R73 "5.1K" 0603R#1 197.068,-169.748 r0 bottom
R75 "5.1K" 0603R#1 197.576,-144.856 r0 bottom
R76 "1K" 0603R#1 182.27,-129.261 r90 bottom
R80 "49.9R_1%" 0805R 202.816,-185.174 r0 top
R81 "3.3K" 0603R#1 203.835,-110.822 r90 bottom
R82 "5.1K" 0603R#1 203.197,-128.651 r90 top
R86 "3.3K" 0603R#1 200.562,-110.822 r90 bottom
R87 "5.1K" 0603R#1 200.607,-128.651 r90 top
R89 "49.9R_1%" 0805R 198.625,-185.174 r0 top
R92 "3.3K" 0603R#1 197.289,-110.822 r90 bottom
R93 "5.1K" 0603R#1 198.016,-128.651 r90 top
R96 "3.3K" 0603R#1 194.016,-110.822 r90 bottom
R97 "5.1K" 0603R#1 195.501,-128.651 r90 top
R102 "5.1K" 0603R#1 61.369,-120.43 r270 top
R105 "1.5K" 0603R#1 167.382,-199.06 r0 top
R106 "510" 0603R#1 163.347,-212.573 r180 top
R107 "510" 0603R#1 208.649,-229.083 r90 bottom
R108 "3.3K" 0603R#1 218.694,-110.822 r90 bottom
R109 "5.1K" 0603R#1 217.472,-128.651 r90 top
R110 "120" 0603R#1 180.769,-108.077 r0 top
R111 "10R/5%" 0603r 128.596,-115.722 r0 top
R113 "3.3K" 0603R#1 215.428,-110.822 r90 bottom
R114 "5.1K" 0603R#1 215.059,-128.651 r90 top
R115 "3.3K" 0603R#1 212.163,-110.822 r90 bottom
R116 "5.1K" 0603R#1 212.392,-128.651 r90 top
R117 "3.3K" 0603R#1 208.897,-110.822 r90 bottom
R118 "5.1K" 0603R#1 209.725,-128.651 r90 top
R120 "10R/5%" 0603r 128.596,-112.039 r0 top
R121 "10R/5%" 0603r 128.596,-113.817 r0 top
R122 "51K" 0603R#1 206.998,-235.788 r180 bottom
R123 "51K" 0603R#1 42.747,-235.788 r180 bottom
R124 "510" 0603R#1 44.825,-229.083 r90 bottom
R125 "51K" 0603R#1 182.114,-235.788 r180 bottom
R126 "51K" 0603R#1 29.841,-235.788 r180 bottom
R127 "510" 0603R#1 183.779,-229.083 r90 bottom
R128 "510" 0603R#1 32.029,-229.083 r90 bottom
R129 "51K" 0603R#1 194.814,-235.788 r180 bottom
R130 "51K" 0603R#1 17.624,-235.788 r180 bottom
R131 "510" 0603R#1 196.745,-229.083 r90 bottom
R132 "510" 0603R#1 19.603,-229.083 r90 bottom
R133 "51K" 0603R#1 169.086,-235.788 r180 bottom
R134 "51K" 0603R#1 4.365,-235.788 r180 bottom
R135 "510" 0603R#1 171.031,-229.083 r90 bottom
R136 "510" 0603R#1 6.484,-229.083 r90 bottom
R137 "51K" 0603R#1 156.384,-235.788 r180 bottom
R138 "51K" 0603R#1 -8.765,-235.788 r180 bottom
R139 "510" 0603R#1 158.47,-229.083 r90 bottom
R140 "510" 0603R#1 -6.632,-229.083 r90 bottom
R141 "51K" 0603R#1 143.969,-235.788 r180 bottom
R142 "510" 0603R#1 145.941,-229.083 r90 bottom
R143 "51K" 0603R#1 -21.314,-235.788 r180 bottom
R144 "510" 0603R#1 -19.296,-229.083 r90 bottom
R145 "51K" 0603R#1 131.162,-235.788 r180 bottom
R146 "51K" 0603R#1 -34.445,-235.788 r180 bottom
R147 "510" 0603R#1 133.147,-229.083 r90 bottom
R148 "510" 0603R#1 -32.159,-229.083 r90 bottom
R149 "51K" 0603R#1 118.64,-235.788 r180 bottom
R150 "510" 0603R#1 120.511,-229.083 r90 bottom
R151 "51K" 0603R#1 106.016,-235.788 r180 bottom
R152 "510" 0603R#1 107.901,-229.083 r90 bottom
R153 "51K" 0603R#1 93.621,-235.788 r180 bottom
R154 "510" 0603R#1 95.646,-229.083 r90 bottom
R155 "51K" 0603R#1 80.921,-235.788 r180 bottom
R156 "510" 0603R#1 82.832,-229.083 r90 bottom
R157 "51K" 0603R#1 67.865,-235.788 r180 bottom
R158 "510" 0603R#1 70.044,-229.083 r90 bottom
R159 "51K" 0603R#1 55.064,-235.788 r180 bottom
R160 "510" 0603R#1 57.383,-229.083 r90 bottom
R161 "47K" 0603r 152.093,-125.171 r270 top
R162 "4.7K" 0603R#1 142.06,-123.368 r0 top
R163 "47K" 0603r 142.06,-125.019 r0 top
R164 "1K" 0603r 127.582,-140.894 r180 top
R165 "4.7K" 0603R#1 122.883,-135.433 r0 top
R166 "47K" 0603r 122.883,-137.211 r0 top
R167 "1K" 0603R#2 92.024,-108.433 r90 top
R168 "10K" 0603R#1 128.877,-184.226 r0 bottom
R170 "1K" 0603r 157.404,-183.007 r90 top
R171 "1K" 0603r 151.054,-182.829 r90 top
R172 "10K" 0603r 74.422,-108.864 r0 top
R173 "14D561K" 14D561K -29.517,-202.108 r90 top
R174 "1MΩ/2W" 5x15.5 -33.632,-156.058 r0 top
R175 "20D471K" 20D471K -17.91,-177.927 r180 top
R176 "14D561K" 14D561K -19.637,-195.047 r270 top
R177 "B5G3600" B5G3600 -31.422,-215.443 r0 top
R178 "NC" 0603r 79.576,-182.474 r180 bottom
R179 "100K" 0603R#1 76.045,-200.33 r270 top
R180 "120K/1%" 0603R#1 106.5,-152.907 r270 top
R181 "51K/1%" 0603R#1 104.595,-152.907 r270 top
R182 "100K" 0603R#1 88.434,-194.361 r90 top
R183 "100K/1%" 0603R#1 100.048,-167.615 r0 top
R184 "1K" 0603R#1 101.809,-131.868 r90 top
R185 "120K/1%" 0603R#1 105.915,-130.404 r270 top
R186 "71.5K/1%" 0603R#1 103.867,-130.378 r270 top
R189 "5.1K" 0603R#1 199.989,-155.27 r90 bottom
R190 "1.5K" 0603R#1 197.576,-143.332 r0 bottom
R191 "1K" 0603R#1 215.515,-160.223 r180 bottom
R192 "1K" 0603R#1 215.542,-139.979 r180 top
R193 "1K" 0603R#1 215.542,-137.998 r180 top
R194 "1K" 0603R#1 215.542,-162.636 r180 top
R195 "1K" 0603R#1 215.542,-160.858 r180 top
R196 "1K" 0603R#1 215.515,-143.485 r180 bottom
R197 "1K" 0603R#1 215.515,-141.707 r180 bottom
R198 "1K" 0603R#1 218.742,-161.874 r180 bottom
R199 "1K" 0603R#1 218.768,-139.979 r180 top
R200 "1K" 0603R#1 218.768,-162.636 r180 top
R201 "1K" 0603R#1 218.742,-143.485 r180 bottom
R202 "1K" 0603R#1 215.515,-168.91 r180 bottom
R203 "1K" 0603R#1 215.515,-167.259 r180 bottom
R204 "1K" 0603R#1 215.542,-147.574 r180 top
R205 "1K" 0603R#1 215.542,-145.644 r180 top
R206 "1K" 0603R#1 215.542,-170.637 r180 top
R207 "1K" 0603R#1 215.542,-168.859 r180 top
R208 "1K" 0603R#1 215.515,-147.879 r180 bottom
R209 "1K" 0603R#1 215.515,-146.253 r180 bottom
R210 "1K" 0603R#1 218.742,-168.91 r180 bottom
R211 "1K" 0603R#1 218.768,-147.574 r180 top
R212 "1K" 0603R#1 218.768,-170.637 r180 top
R213 "1K" 0603R#1 218.742,-147.879 r180 bottom
R214 "1K" 0603R#1 215.515,-178.807 r180 bottom
R215 "1K" 0603R#1 215.515,-177.089 r180 bottom
R216 "1K" 0603R#1 215.515,-152.654 r180 bottom
R217 "1K" 0603R#1 215.515,-150.749 r180 bottom
R218 "1K" 0603R#1 215.542,-175.412 r180 top
R219 "1K" 0603R#1 215.542,-173.558 r180 top
R220 "1K" 0603R#1 215.542,-155.956 r180 top
R221 "1K" 0603R#1 215.542,-154.153 r180 top
R222 "1K" 0603R#1 218.742,-178.807 r180 bottom
R223 "1K" 0603R#1 218.742,-152.679 r180 bottom
R224 "1K" 0603R#1 218.768,-175.412 r180 top
R225 "1K" 0603R#1 218.793,-155.956 r180 top
R226 "10R/5%/NC" 0603r 128.473,-119.786 r0 top
R227 "10K" 0603R#1 179.603,-129.261 r90 bottom
R246 "1K" 0603R#1 215.515,-161.9 r180 bottom
SIM1 "nano sim" "Nano SIM" 125.346,-119.786 r270 top
T1 "TP" M2.5 229.594,-268.781 r0 top locked
T2 "TP" M2.5 229.594,-103.781 r0 top locked
T3 "TP" M2.5 -44.406,-268.781 r0 top locked
T4 "TP" M2.5 -44.406,-103.781 r0 top locked
TP1 "TEST_POINT" TPD 192.532,-172.796 r90 top
TP3 "TEST_POINT" TPD 210.589,-148.615 r180 top
TP6 "TEST_POINT" TPD 194.589,-149.962 r180 top
TP8 "TEST_POINT" TPD 196.476,-145.535 r180 top
TP18 "TEST_POINT" TPD 196.941,-171.78 r90 top
U1 "LT1790-2.5" SOT23-6 193.749,-173.634 r180 bottom
U2 "TLV2454IPW" TSSOP14 187.627,-189.492 r180 top
U3 "TLV2454IPW" TSSOP14 187.627,-199.525 r180 top
U4 "ADS1158" S-PVFQN-N48 203.545,-174.066 r270 top
U6 "LM22676MRE-5.0/NOPB" SOP127P600X168_HS-8N 82.522,-201.346 r180 top
U7 "TLV2454IPW" TSSOP14 187.373,-210.447 r180 top
U9 "ISO7241C" SOIC16 180.21,-145.39 r180 top
U10 "ISO7241C" SOIC16 180.337,-159.36 r0 top
U11 "AD5410AREZ-REEL7" AD5410AREZ-REEL7 168.374,-204.699 r0 top
U12 "ISO3080" SO-16 177.137,-128.905 r90 top
U13 "AIR780EX" AIR780EX 142.568,-144.831 r270 top
U14 "SMF05C" sc70-6l 136.218,-115.367 r270 top
U16 "SN74HC595DBR" SSOP16 110.437,-215.341 r90 top
U17 "TLP291-4" SOP16-T 217.472,-116.967 r270 top
U18 "ISO7241C" SOIC16 180.337,-175.616 r0 top
U19 "AQY210S" sop4 44.825,-231.851 r270 top
U20 "AQY210S" sop4 183.779,-231.851 r270 top
U21 "AQY210S" sop4 32.061,-231.851 r270 top
U22 "SN74HC595DBR" SSOP16 123.137,-215.341 r90 top
U23 "AQY210S" sop4 196.745,-231.851 r270 top
U25 "TLP291-4" SOP16-T 203.121,-117.094 r270 top
U26 "ADUM1400" SOIC16 154.607,-205.054 r0 top
U27 "AQY210S" sop4 19.603,-231.851 r270 top
U28 "SN74HC595DBR" SSOP16 135.202,-215.341 r90 top
U29 "AQY210S" sop4 171.031,-231.851 r270 top
U30 "AQY210S" sop4 6.484,-231.851 r270 top
U31 "AQY210S" sop4 158.47,-231.851 r270 top
U32 "AQY210S" sop4 -6.632,-231.851 r270 top
U33 "AQY210S" sop4 145.941,-231.851 r270 top
U34 "AQY210S" sop4 -19.296,-231.851 r270 top
U35 "AQY210S" sop4 133.147,-231.851 r270 top
U36 "AQY210S" sop4 -32.159,-231.851 r270 top
U37 "AQY210S" sop4 120.511,-231.851 r270 top
U38 "AQY210S" sop4 107.901,-231.851 r270 top
U39 "AQY210S" sop4 95.646,-231.851 r270 top
U40 "AQY210S" sop4 82.832,-231.851 r270 top
U41 "AQY210S" sop4 70.044,-231.851 r270 top
U42 "AQY210S" sop4 57.383,-231.851 r270 top
U44 "STM32F405RGT6" LQFP-64 126.591,-181.178 r0 top
U45 "AQY210S" sop4 165.707,-212.573 r0 top
U46 "AQY210S" sop4 208.649,-231.851 r270 top
U47 "LHE60-20B24" LHE60-20B24 35.075,-116.103 r270 top locked
U48 "FL2D-30-222" TY-100P -29.286,-137.947 r0 top
U49 "URB24_LD-50WR3G" URB24_LD-50WR3G 69.416,-138.024 r270 top
U50 "MIC29302" TO228P1435X457-6N 101.521,-164.338 r180 top
U51 "LM22676MRE-5.0/NOPB" SOP127P600X168_HS-8N 89.913,-186.938 r270 top
U52 "MIC29302" TO228P1435X457-6N 101.648,-143.383 r180 top
U54 "ADS1158" S-PVFQN-N48 204.053,-148.285 r270 top
U56 "LT1790-2.5" SOT23-6 193.827,-149.073 r0 bottom
USB "Header 5" USB-MICRO-5P 140.31,-101.676 r0 top
X2 "32768" A 203.418,-166.446 r180 top
X3 "32768" A 203.799,-140.792 r180 top
Y1 "8MHz" CRAY_5032 119.987,-181.94 r270 top

## Footprints (in the part's own frame and the unit in brackets; to place one, negate y for a bottom-side part, rotate by r counter-clockwise, add the part's x,y. Pads: shape width x height; smd on the part's side, far side on the other; paste and mask are expansions set on the pad)
2.0x8 [mm]
  rect 1.2x1.2 hole 0.7: 1(0,0)
  round 1.2 hole 0.7: 2(2,0) 3(4,0) 4(6,0) 5(8,0) 6(10,0) 7(12,0) 8(14,0)
  silkscreen extent -2,-2.9 16,1.8
2X2.54MMZ [mm]
  rect 2x3 hole 1.2: 1(0,0)
  oval 2x3 hole 1.2: 2(2.54,-0.1)
  silkscreen extent -3,-4.1 5.54,2.9
5x15.5 [mm]
  round 1.8 hole 0.9: 1(0,0) 2(20.5,0)
  silkscreen extent 2.5,-2.5 18,2.5
14D561K [mm]
  round 1.8 hole 1.1: 1(0,0) 2(7.5,0)
  silkscreen extent -4.5,-3.21 11.5,3.21
15x18 [mm]
  round 1.8 hole 0.9: 1(0,0)
  round 1.8 hole 1.1: 2(15,0)
  silkscreen extent -1.5,-2.92 16.5,3
20D471K [mm]
  round 1.8 hole 1.1: 1(0,0) 2(10,0)
  silkscreen extent -6.5,-5.5 16.5,5.5
0402R [mm]
  rect 0.6x0.6 smd: 1(0,0) 2(1,0)
  silkscreen extent -0.4,-0.4 1.4,0.4
0603C [mm]
  rect 0.7x0.85 smd: 1(0,0) 2(1.5,0)
  silkscreen extent -0.5,-0.55 2,0.55
0603c [mm]
  rect 0.7x0.85 smd: 1(0,0) 2(1.5,0)
  silkscreen extent -0.5,-0.55 2,0.55
0603led [mm]
  rect 0.7x0.85 smd: 1(0,0) 2(1.5,0)
  silkscreen extent -0.5,-0.55 2,0.55
0603LED [mm]
  rect 0.7x0.85 smd: 1(0,0) 2(1.5,0)
  silkscreen extent -0.5,-0.55 2,0.55
0603R#1 [mm]
  rect 0.7x0.85 smd: 1(0,0) 2(1.5,0)
  silkscreen extent -0.5,-0.55 2,0.55
0603R#2 [mm]
  rect 0.762x0.889 smd: 1(-0.699,0) 2(0.699,0)
  silkscreen extent -1.32,-0.69 1.32,0.69
0603r [mm]
  rect 0.7x0.85 smd: 1(0,0) 2(1.5,0)
  silkscreen extent -0.5,-0.55 2,0.55
0805C [mm]
  rect 1x1.3 smd: 1(0,0) 2(2,0)
  silkscreen extent -0.7,-0.8 2.7,0.8
0805CZ [mm]
  rect 1x1.3 smd: 1(0,0) 2(2,0)
  silkscreen extent -0.7,-0.8 2.7,0.8
0805r [mm]
  rect 1x1.3 smd: 1(0,0) 2(2,0)
  silkscreen extent -0.7,-0.8 2.7,0.8
0805R [mm]
  rect 1x1.3 smd: 1(0,0) 2(2,0)
  silkscreen extent -0.7,-0.8 2.7,0.8
1206C [mm]
  rect 1x1.8 smd: 1(0,0) 2(3.25,0)
  silkscreen extent -0.8,-1.1 4.05,1.1
1206R [mm]
  rect 1x1.8 smd: 1(0,0) 2(3.25,0)
  silkscreen extent -0.7,-1.1 3.95,1.1
1210C [mm]
  rect 1x2.7 smd: 1(0,0) 2(3.25,0)
  silkscreen extent -0.8,-1.5 4.05,1.5
1812-F [mm]
  rect 1.3x3.5 smd: 1(0,0) 2(4.5,0)
  silkscreen extent -1,-1.95 5.5,1.95
A [mil]
  round 50 hole 32: 1(70,0)
  rect 50x50 hole 32: 2(0,0)
  rect 100x250 smd: 3(34.37,-175)
  silkscreen extent -40,-40 105,40
AD5410AREZ-REEL7 [mm] "SOP, 24-Leads, Body 7.8x4.4mm (max), Pitch 0.65mm, IPC Medium Density"
  oval 1.45x0.45 smd: 1(-2.925,3.575) 2(-2.925,2.925) 3(-2.925,2.275) 4(-2.925,1.625) 5(-2.925,0.975) 6(-2.925,0.325) 7(-2.925,-0.325) 8(-2.925,-0.975) 9(-2.925,-1.625) 10(-2.925,-2.275) 11(-2.925,-2.925) 12(-2.925,-3.575) 13(2.925,-3.575) 14(2.925,-2.925) 15(2.925,-2.275) 16(2.925,-1.625) 17(2.925,-0.975) 18(2.925,-0.325) 19(2.925,0.325) 20(2.925,0.975) 21(2.925,1.625) 22(2.925,2.275) 23(2.925,2.925) 24(2.925,3.575)
  rect 3x5 smd: 25(0,0)
  silkscreen extent -3.05,-3.9 1.8,4.47, body extent -2.2,-3.9 2.2,3.9, height 2.65
AIR780EX [mm]
  oval 2.3x0.65 smd: 1(-7.75,6.6) 2(-7.75,5.5) 3(-7.75,4.4) 4(-7.75,3.3) 5(-7.75,2.2) 6(-7.75,1.1) 7(-7.75,0) 8(-7.75,-1.1) 9(-7.75,-2.2) 10(-7.75,-3.3) 11(-7.75,-4.4) 12(-7.75,-5.5) 13(-7.75,-6.6) 23(7.75,-6.6) 24(7.75,-5.5) 25(7.75,-4.4) 26(7.75,-3.3) 27(7.75,-2.2) 28(7.75,-1.1) 29(7.75,0) 30(7.75,1.1) 31(7.75,2.2) 32(7.75,3.3) 33(7.75,4.4) 34(7.75,5.5) 35(7.75,6.6)
  oval 0.65x2.3 smd: 14(-4.4,-8.7) 15(-3.3,-8.7) 16(-2.2,-8.7) 17(-1.1,-8.7) 18(0,-8.7) 19(1.1,-8.7) 20(2.2,-8.7) 21(3.3,-8.7) 22(4.4,-8.7) 36(4.4,8.7) 37(3.3,8.7) 38(2.2,8.7) 39(1.1,8.7) 40(0,8.7) 41(-1.1,8.7) 42(-2.2,8.7) 43(-3.3,8.7) 44(-4.4,8.7) 95(-5.5,-8.7) 96(5.5,-8.7) 97(5.5,8.7) 98(-5.5,8.7)
  rect 1.3x1.3 smd: 89(-0.9,1.8) 90(-0.9,0) 91(-0.9,-1.8) 92(0.9,-1.8) 93(0.9,0) 94(0.9,1.8)
  silkscreen extent -9.05,-10 9.05,10
B5G3600 [mm]
  round 1.8 hole 0.9: 1(0,0)
  round 1.8 hole 1.1: 2(10,0)
  silkscreen extent -2,-2.75 12,2.75
BUFFER_0905 [mm]
  round 1.5 hole 0.9: 1(0,0) 2(5,0)
  silkscreen extent -2,-4.5 7,4.5
C3528 [mil]
  rect 60x100 smd: 1(0,0) 2(135,0)
  silkscreen extent -50,-70 185,70
CDRH105 [mm]
  rect 3.2x1.6 smd: 1(5.1,-0.65) 2(5.1,-9.55)
  silkscreen extent 0,-10.2 10.2,0
CRAY_5032 [mm]
  rect 1.7x2 smd: 1(0,0) 2(3.7,0)
  silkscreen extent -0.86,-1.6 4.55,1.6
DO-213AB/LL34/MiniMELF [mm]
  rect 0.9x1.5 smd: 1(1.75,0) 2(-1.75,0)
  silkscreen extent -1.8,-1.08 1.8,1.08
DO-214AC [mm] "Molded Diode, 2-Leads, Body 4.3x2.7mm, IPC Medium Density"
  rect 1.85x1.7 smd: 1(-2.05,0) 2(2.05,0)
  silkscreen extent -2.3,-1.45 3.07,1.45, body extent -2.3,-1.45 2.3,1.45, height 2.44
G2RL-1-H [mm]
  round 1.5 hole 0.9: 1(20,0) 2(16.5,-7.5) 3(23.5,-7.5) 4(0,-7.5) 5(0,0)
  silkscreen extent -2.3,-10 26.7,2.5
HDR1X2 [mm] "Connector; Header; 2 Position"
  rect 1.5x1.5 hole 0.9: 1(0,0)
  round 1.5 hole 0.9: 2(2.54,0)
  silkscreen extent -1.27,-1.27 3.81,1.27
HDR1X4 [mm] "Connector; Header; 4 Position"
  rect 1.5x1.5 hole 0.9: 1(0,0)
  round 1.5 hole 0.9: 2(2.54,0) 3(5.08,0) 4(7.62,0)
  silkscreen extent -1.27,-1.27 8.89,1.27
KF128V-3P [mm]
  round 2.5 hole 1.5: 1(0,0) 2(5.08,0) 3(10.16,0)
  silkscreen extent -3.1,-5.4 13.33,4.8
KH-SMA-KE-Z [mm]
  round 1.8 hole 1.2: 1(0,0)
  round 2.2 hole 1.5: 2(-2.54,2.54) 3(2.54,2.54) 4(2.54,-2.54) 5(-2.54,-2.54)
  silkscreen extent -3.25,-3.25 3.25,3.25
LHE60-20B24 [mm]
  round 3 hole 1.9: 1(0,0) 2(0,-10.16) 3(0,-29.21) 4(96.32,-28.59) 5(96.32,-19.69) 6(96.32,-14.61)
  silkscreen extent -6.34,-42.9 102.66,15.6
LQFP-64 [mm]
  rect 1.6x0.3 smd: 1(0,0)
  oval 1.6x0.3 smd: 2(0,-0.5) 3(0,-1) 4(0,-1.5) 5(0,-2) 6(0,-2.5) 7(0,-3) 8(0,-3.5) 9(0,-4) 10(0,-4.5) 11(0,-5) 12(0,-5.5) 13(0,-6) 14(0,-6.5) 15(0,-7) 16(0,-7.5) 33(12.5,-7.5) 34(12.5,-7) 35(12.5,-6.5) 36(12.5,-6) 37(12.5,-5.5) 38(12.5,-5) 39(12.5,-4.5) 40(12.5,-4) 41(12.5,-3.5) 42(12.5,-3) 43(12.5,-2.5) 44(12.5,-2) 45(12.5,-1.5) 46(12.5,-1) 47(12.5,-0.5) 48(12.5,0)
  oval 0.3x1.6 smd: 17(2.5,-10) 18(3,-10) 19(3.5,-10) 20(4,-10) 21(4.5,-10) 22(5,-10) 23(5.5,-10) 24(6,-10) 25(6.5,-10) 26(7,-10) 27(7.5,-10) 28(8,-10) 29(8.5,-10) 30(9,-10) 31(9.5,-10) 32(10,-10) 49(10,2.5) 50(9.5,2.5) 51(9,2.5) 52(8.5,2.5) 53(8,2.5) 54(7.5,2.5) 55(7,2.5) 56(6.5,2.5) 57(6,2.5) 58(5.5,2.5) 59(5,2.5) 60(4.5,2.5) 61(4,2.5) 62(3.5,2.5) 63(3,2.5) 64(2.5,2.5)
  silkscreen extent 1.59,-8.41 10.91,0.91
M2.5 [mm]
  round 5 hole 2.8 unplated: 1(0,0)
  silkscreen extent -5,-5 5,5
"Nano SIM" [mm]
  rect 0.7x2.1 smd: 0(-8.97,-1.615) 0(-8.97,-13.615) 0(4.02,-1.615) 0(4.02,-13.615)
  rect 0.65x1.23 smd: 1(-2.22,0) 2(-4.76,0) 3(-7.3,0) 5(-0.95,0) 6(-3.49,0) 7(-6.03,0) 8(0,0)
  Keep-Out Layer circle w0.254: c1.03,-12.365 r0.45
  Keep-Out Layer circle w0.254: c-7.47,-12.365 r0.45
  silkscreen extent -8.33,-13.64 3.38,-0.91
S-PVFQN-N48 [mm]
  oval 0.85x0.28 smd mask+0.07: 1(-3.45,2.75) 2(-3.45,2.25) 3(-3.45,1.75) 4(-3.45,1.25) 5(-3.45,0.75) 6(-3.45,0.25) 7(-3.45,-0.25) 8(-3.45,-0.75) 9(-3.45,-1.25) 10(-3.45,-1.75) 11(-3.45,-2.25) 12(-3.45,-2.75) 25(3.45,-2.75) 26(3.45,-2.25) 27(3.45,-1.75) 28(3.45,-1.25) 29(3.45,-0.75) 30(3.45,-0.25) 31(3.45,0.25) 32(3.45,0.75) 33(3.45,1.25) 34(3.45,1.75) 35(3.45,2.25) 36(3.45,2.75)
  oval 0.28x0.85 smd mask+0.07: 13(-2.75,-3.45) 14(-2.25,-3.45) 15(-1.75,-3.45) 16(-1.25,-3.45) 17(-0.75,-3.45) 18(-0.25,-3.45) 19(0.25,-3.45) 20(0.75,-3.45) 21(1.25,-3.45) 22(1.75,-3.45) 23(2.25,-3.45) 24(2.75,-3.45) 37(2.75,3.45) 38(2.25,3.45) 39(1.75,3.45) 40(1.25,3.45) 41(0.75,3.45) 42(0.25,3.45) 43(-0.25,3.45) 44(-0.75,3.45) 45(-1.25,3.45) 46(-1.75,3.45) 47(-2.25,3.45) 48(-2.75,3.45)
  rect 5.1x5.1 smd: 49(0,0)
  silkscreen extent -4.62,-4.19 4.19,4.19, body extent -3.45,-3.45 3.45,3.45, height 0.9
sc70-6l [mm]
  rect 0.85x0.4 smd: 1(-0.925,0.65) 2(-0.925,0) 3(-0.925,-0.65) 4(0.925,-0.65) 5(0.925,0) 6(0.925,0.65)
  silkscreen extent -1.09,-1.1 0.25,1.65
sma [mm]
  rect 2x2 smd: 1(0,0) 2(4,0)
  silkscreen extent -1.3,-1.5 5.3,1.5
SMA [mm]
  rect 2x2 smd: 1(0,0) 2(4,0)
  silkscreen extent -1.3,-1.5 5.3,1.5
SMB [mm]
  rect 2.2x2.8 smd: 1(0,0) 2(4.5,0)
  silkscreen extent -1.3,-1.8 5.8,1.8
SMC [mm]
  rect 2.5x3.3 smd: 1(0,0) 2(6.75,0)
  silkscreen extent -0.35,-3.25 7.15,3.25
smc [mm]
  rect 2.5x3.3 smd: 1(0,0) 2(6.75,0)
  silkscreen extent -0.35,-3.25 7.15,3.25
SO-16 [mm]
  rect 2x0.5 smd: 1(0,0)
  oval 2x0.5 smd: 2(0,-1.27) 3(0,-2.54) 4(0,-3.81) 5(0,-5.08) 6(0,-6.35) 7(0,-7.62) 8(0,-8.89) 9(10,-8.89) 10(10,-7.62) 11(10,-6.35) 12(10,-5.08) 13(10,-3.81) 14(10,-2.54) 15(10,-1.27) 16(10,0)
  silkscreen extent 1.84,-9.53 8.17,0.64
sod323 [mm]
  rect 0.5x0.5 smd: 1(0,0) 2(2.1,0)
  silkscreen extent 0,-0.67 2.1,0.68
SOIC16 [mil]
  rect 91x22 smd: 1(-183,165) 2(-183,115) 3(-183,65) 4(-183,15) 5(-183,-35) 6(-183,-85) 7(-183,-135) 8(-183,-185) 9(173,-185) 10(173,-135) 11(173,-85) 12(173,-35) 13(173,15) 14(173,65) 15(173,115) 16(173,165)
  silkscreen extent -155,-217 145,197
sop4 [mil]
  rect 80x30 smd: 1(0,0) 2(0,-100) 3(250,-100) 4(249,0)
  silkscreen extent 76,-125 176,21
SOP16-T [mm]
  rect 1.2x0.8 smd: 1(0,0) 2(0,-1.27) 3(0,-2.54) 4(0,-3.81) 5(0,-5.08) 6(0,-6.35) 7(0,-7.62) 8(0,-8.89) 9(6.3,-8.89) 10(6.3,-7.62) 11(6.3,-6.35) 12(6.3,-5.08) 13(6.3,-3.81) 14(6.3,-2.54) 15(6.3,-1.27) 16(6.3,0)
  silkscreen extent 1.41,-9.53 4.89,0.64
SOP127P600X168_HS-8N [mm] "SOP, 8-Leads, Body 5.0x4.0mm (max), Pitch 1.27mm, IPC Medium Density"
  oval 1.75x0.6 smd: 1(-2.6,1.905) 2(-2.6,0.635) 3(-2.6,-0.635) 4(-2.6,-1.905) 5(2.6,-1.905) 6(2.6,-0.635) 7(2.6,0.635) 8(2.6,1.905)
  rect 1.9x3 smd: 9(0,0)
  silkscreen extent -2.73,-2.5 1.33,2.88, body extent -2,-2.5 2,2.5, height 1.68
SOT23-3 [mm]
  rect 1x0.6 smd: 1(0,0) 2(0,2) 3(-2.5,1)
  silkscreen extent -2.1,-0.5 -0.5,2.5
SOT23-6 [mm]
  rect 1.1x0.5 smd: 1(-1.2,0.95)
  oval 1.1x0.5 smd: 2(-1.2,0) 3(-1.2,-0.95) 4(1.2,-0.95) 5(1.2,0) 6(1.2,0.95)
  silkscreen extent -1.32,-1.5 0.25,1.92, body extent -0.87,-1.5 0.88,1.5, height 1.45
SSOP16 [mm] "SOP, 16-Leads, Body 5.1x4.5mm (max), Pitch 0.65mm, IPC Medium Density"
  rect 2x0.32 smd: 1(-1.448,-0.432)
  oval 2x0.32 smd: 2(-1.448,-1.082) 3(-1.448,-1.732) 4(-1.448,-2.382) 5(-1.448,-3.032) 6(-1.448,-3.682) 7(-1.448,-4.332) 8(-1.448,-4.982) 9(6.352,-4.982) 10(6.352,-4.332) 11(6.352,-3.682) 12(6.352,-3.032) 13(6.352,-2.382) 14(6.352,-1.732) 15(6.352,-1.082) 16(6.352,-0.432)
  silkscreen extent -2.88,-5.9 7.87,0.42
TO228P1435X457-6N [mm] "D2-PAK, 6-Pads, Body 8.6x10.2mm (max), IPC Medium Density"
  rect 1.85x0.95 smd: 1(0,0) 2(0,-1.8) 3(0,-3.6) 4(0,-5.4) 5(0,-7.2)
  rect 6.8x6.8 smd: 6(11,-3.671)
  silkscreen extent -0.13,-8.77 7.2,1.43, body extent 4.2,-8.77 12.84,1.43, height 4.57
TPD [mm]
  round 1 smd: 1(0,0)
TSSOP14 [mil]
  rect 66x14 smd: 1(-111,76.77) 2(-111,51.18) 3(-111,25.59) 4(-111,0) 5(-111,-25.59) 6(-111,-51.18) 7(-111,-76.77) 8(111,-76.77) 9(111,-51.18) 10(111,-25.59) 11(111,0) 12(111,25.59) 13(111,51.18) 14(111,76.77)
  silkscreen extent -89,-101 89,101
TY-100P [mm]
  round 1.8 hole 1.2: 1(0,0) 2(10.7,0) 3(10.7,-5.08) 4(0,-5.08)
  silkscreen extent -4.15,-8.08 14.86,2.96
URB24_LD-50WR3G [mm]
  round 2.5 hole 1.6: 1(2.54,7.62) 5(48.26,0)
  round 2.5 hole 1.5: 2(2.54,-2.54) 3(2.54,-7.62) 4(48.26,-10.16) 6(48.26,10.16)
  silkscreen extent 0,-12.7 50.8,12.7
USB-MICRO-5P [mm]
  round 0.5 hole 0.5 unplated: 0(0.4,-2.65) 0(5.25,-2.65)
  rect 0.4x3 smd: 1(4.125,-2.65) 2(3.475,-2.65) 3(2.825,-2.65) 4(2.175,-2.65) 5(1.525,-2.65)
  rect 1.35x1.85 hole 0.9 slot 1.3 at 90 deg: 6(6.45,0) 7(-0.8,0)
  silkscreen extent -1.17,-3.35 6.83,2.45
XH2.54_2X9 [mm]
  rect 1.5x1.5 hole 0.9: 1(0,0)
  round 1.5 hole 0.9: 2(0,2.54) 3(2.54,0) 4(2.54,2.54) 5(5.08,0) 6(5.08,2.54) 7(7.62,0) 8(7.62,2.54) 9(10.16,0) 10(10.16,2.54) 11(12.7,0) 12(12.7,2.54) 13(15.24,0) 14(15.24,2.54) 15(17.78,0) 16(17.78,2.54) 17(20.32,0) 18(20.32,2.54)
  silkscreen extent -1.75,-3.68 22.07,6.63
XH2.54_2X12 [mm]
  rect 1.5x1.5 hole 0.9: 1(0,0)
  round 1.5 hole 0.9: 2(0,2.54) 3(2.54,0) 4(2.54,2.54) 5(5.08,0) 6(5.08,2.54) 7(7.62,0) 8(7.62,2.54) 9(10.16,0) 10(10.16,2.54) 11(12.7,0) 12(12.7,2.54) 13(15.24,0) 14(15.24,2.54) 15(17.78,0) 16(17.78,2.54) 17(20.32,0) 18(20.32,2.54) 19(22.86,0) 20(22.86,2.54) 21(25.4,0) 22(25.4,2.54) 23(27.94,0) 24(27.94,2.54)
  silkscreen extent -1.75,-3.68 29.69,6.62
XH2.54_2X18 [mm]
  rect 1.5x1.5 hole 0.9: 1(0,0)
  round 1.5 hole 0.9: 2(0,2.54) 3(2.54,0) 4(2.54,2.54) 5(5.08,0) 6(5.08,2.54) 7(7.62,0) 8(7.62,2.54) 9(10.16,0) 10(10.16,2.54) 11(12.7,0) 12(12.7,2.54) 13(15.24,0) 14(15.24,2.54) 15(17.78,0) 16(17.78,2.54) 17(20.32,0) 18(20.32,2.54) 19(22.86,0) 20(22.86,2.54) 21(25.4,0) 22(25.4,2.54) 23(27.94,0) 24(27.94,2.54) 25(30.48,0) 26(30.48,2.54) 27(33.02,0) 28(33.02,2.54) 29(35.56,0) 30(35.56,2.54) 31(38.1,0) 32(38.1,2.54) 33(40.64,0) 34(40.64,2.54) 35(43.18,0) 36(43.18,2.54)
  silkscreen extent -1.75,-3.68 44.93,6.63
XH2.54_2X20 [mm]
  rect 1.5x1.5 hole 0.9: 1(0,0)
  round 1.5 hole 0.9: 2(0,2.54) 3(2.54,0) 4(2.54,2.54) 5(5.08,0) 6(5.08,2.54) 7(7.62,0) 8(7.62,2.54) 9(10.16,0) 10(10.16,2.54) 11(12.7,0) 12(12.7,2.54) 13(15.24,0) 14(15.24,2.54) 15(17.78,0) 16(17.78,2.54) 17(20.32,0) 18(20.32,2.54) 19(22.86,0) 20(22.86,2.54) 21(25.4,0) 22(25.4,2.54) 23(27.94,0) 24(27.94,2.54) 25(30.48,0) 26(30.48,2.54) 27(33.02,0) 28(33.02,2.54) 29(35.56,0) 30(35.56,2.54) 31(38.1,0) 32(38.1,2.54) 33(40.64,0) 34(40.64,2.54) 35(43.18,0) 36(43.18,2.54) 37(45.72,0) 38(45.72,2.54) 39(48.26,0) 40(48.26,2.54)
  silkscreen extent -1.75,-3.68 50.01,6.62
Φ10×10 [mm]
  oval 1.524x4 smd: 1(0,4.25) 2(0,-4.25)
  silkscreen extent -5.15,-5.71 5.15,6.35
可视开关电源保险丝座 [mm]
  round 3 hole 1.7: 1(0,0) 2(22.4,0)
  silkscreen extent -2.69,-4.86 24.98,4.64

## Part data
C1 C35 C36 C37 C38 C39 C40 C41 C54 C62 C67 C68 C87 C88 C89 C90 C91 C92 C93 C94 C95 C96 C97 C98 C101 C102 C103 C104 C106 C107 C109 C110 C111 C112 C118 C137 C139 C140 C143 C144 C145 C156 C162: library part CAP, "Capacitor"
C2 C3 C4 C5 C6 C7 C8 C12 C13 C16 C17 C21 C22 C25 C26 C29 C30 C33 C34 C42 C43 C47 C48 C49 C56 C57 C58 C59 C63 C65 C73 C76 C78 C79 C80 C84 C85 C86 C108 C114 C115 C116 C117 C119 C120 C121 C122 C123 C124 C125 C126 C127 C128 C129 C130 C131 C132 C133 C134 C135 C136 C138 C141 C146 C147 C151 C153 C157 C159 C160 C161 C163 C164 C165 C166 C167 C168 C169: library part Cap, "Capacitor"
C44 C113 C142 E138 E147: library part "Cap Pol1", "Polarized Capacitor (Radial)"
C45 C46: library part C, "C"
D1 D2 D3 D5 D6 D7 D9 D10 D11 D12 D13 D14 D16 D17 D18 D19 D20 D21 D72: library part Diode, "Default Diode"
D4 D26 D69 D70 D71 D78 D79: library part "DIODE S", "Schottky Diode"
D8: library part "Diode 1N4001", "1 Amp General Purpose Rectifier"
D15 D39 D41 D43 D45 D46 D47 D48 D49 D50 D51 D53 D54 D55 D56 D57 D58 D59 D60 D61 D62 D63 D64 D65 D66 D67 D68 D77: "VISHAY,LL4148,圆柱体MiniMELF100V/2A,ROHS"
D22: library part "D Zener", "Zener Diode"
D52 D75 D76: library part "D Zener", "SMBJ36CA"
E13 E14: library part ELECTRO1, "Electrolytic Capacitor"
F2 F3 F4 F5 F7 F8: library part "Fuse 1", "Fuse"
FB1 FB2 FB3 FB4 FB5 FB6 FB7 FB8: library part FB
K1 K2 K3 K4 K5 K6 K7 K8 K9 K10 K11 K12 K13 K14 K15 K16 K17 K18 K19 K20: library part Relay-SPDT, "Single-Pole Dual-Throw Relay"
L1 L3: library part INDUCTOR
LED2 LED17: library part LED
LS1: "Loudspeaker"
P1: "Header, 12-Pin, Dual row"
P2 P4 P6 P23: "Header, 2-Pin"
P3: "Header, 9-Pin, Dual row"
P5: "Header, 18-Pin, Dual row"
P7: "Header, 3-Pin"
P20: "Header, 20-Pin, Dual row"
P21: "Header, 8-Pin"
P22: "Header, 4-Pin"
P24 USB: "Header, 5-Pin"
Q1 Q3 Q4 Q5 Q6 Q11: library part NPN_MMBT3904
R1 R2 R3 R4 R5 R6 R7 R8 R11 R12 R13 R14 R17 R18 R19 R20 R21 R22 R23 R24 R25 R26 R27 R28 R29 R30 R32 R33 R34 R35 R36 R38 R44 R45 R46 R47 R60 R61 R62 R63 R71 R72 R73 R75 R80 R81 R82 R86 R87 R89 R92 R93 R96 R97 R105 R108 R109 R113 R114 R115 R116 R117 R118 R122 R123 R125 R126 R129 R130 R133 R134 R137 R138 R141 R143 R145 R146 R149 R151 R153 R155 R157 R159 R167 R168 R189 R190: library part Res0805M
R9 R10: library part Resistor, "Resistor SMD - IEC symbol version"
R39 R76 R102 R110 R180 R181 R183 R184 R185 R186 R191 R192 R193 R194 R195 R196 R197 R198 R199 R200 R201 R202 R203 R204 R205 R206 R207 R208 R209 R210 R211 R212 R213 R214 R215 R216 R217 R218 R219 R220 R221 R222 R223 R224 R225 R227 R246: library part R, "R"
R106 R107 R124 R127 R128 R131 R132 R135 R136 R139 R140 R142 R144 R147 R148 R150 R152 R154 R156 R158 R160: library part RES2
R111 R120 R121 R226: library part Res2, "Resistor"
R173 R175 R176 R177: library part "Res Varistor", "Varistor (Voltage-Sensitive Resistor)"
R179 R182: library part Res1, "Resistor"
U1 U56: "2.5V Micropower SOT-23  Low Dropout Reference"
U2 U3 U7: library part MAX908EPD, "Quad High-speed, Ultra Low-power, Single-Supply TTL comparator"
U4 U54: "16-Channel, 16-Bit Analog-to-Digital Converter"
U6 U51: library part LM22676MR-5.0
U16 U22 U28: library part 74HC595
U17 U25: library part TLP281-4
U19 U20 U21 U23 U27 U29 U30 U31 U32 U33 U34 U35 U36 U37 U38 U39 U40 U41 U42 U45 U46: library part Optoisolator1, "4-Pin Phototransistor Optocoupler"
U26: library part ISO7241C
U44: "ARM Cortex-M4 32-bit MCU+FPU, 210 DMIPS, 1024 kB Flash, 192 kB Internal RAM, 51 I/Os, 64-pin LQFP, -40 to 85 degC, Tray"
U48: library part TY-100P, "PCB mounting filters"
X2 X3: library part XTAL, "Crystal Oscillator"
Y1: library part CRYSTAL, "HC49S-8MHz"

## Via types
v1: diameter 0.508, hole 0.305, Top Layer to Bottom Layer, tented both sides, 596 vias
v2: diameter 1.016, hole 0.635, Top Layer to Bottom Layer, tented both sides, 65 vias
v3: diameter 0.6, hole 0.3, Top Layer to Bottom Layer, 50 vias
v4: diameter 0.762, hole 0.508, Top Layer to Bottom Layer, tented both sides, 29 vias
v5: diameter 2.032, hole 1.524, Top Layer to Bottom Layer, tented both sides, 4 vias
v6: diameter 3.048, hole 2.032, Top Layer to Bottom Layer, tented both sides, 3 vias
v7: diameter 1.5, hole 1, Top Layer to Bottom Layer, 2 vias
v8: diameter 2.54, hole 1.778, Top Layer to Bottom Layer, tented both sides, 1 vias

## Nets (pads, with @x,y where several pads share a name; then routed paths per layer and width w, separated by ;. In a path a pad name is that pad's centre, name@x,y a point inside that pad or via, vN(x,y) a via of type N, cw(c..) or ccw(c..) an arc to the next point about the centre after c; other vN are vias at no path point)
2.5VREFM: C1.1 TP1.1 U1.6 U4.31 | length 30
  Top Layer w0.254: v1@203.795,-179.69 U4.31@203.795,-177.516 ; 203.795,-179.327 ccw(c204.238,-179.327) v1@203.925,-179.641
  Top Layer w0.508: TP1.1@192.358,-172.622 ccw(c191.938,-172.202) 192.532,-172.202 ccw(c193.126,-172.202) TP1.1@192.706,-172.622 ; TP1.1@192.532,-172.796 v1@192.532,-171.543
  Bottom Layer w0.508: U1.6@192.549,-172.684 v1(192.549,-171.526) ; C1.1@192.987,-170.586 192.549,-171.024 v1(192.549,-171.526) ; v1(203.835,-179.73) 202.26,-181.305 193.446,-181.305 190.983,-178.841 190.983,-172.187 191.643,-171.526 v1(192.549,-171.526)
2.5VREFM2: C156.1 TP6.1 U54.31 U56.6 | length 15.6
  Top Layer w0.254: TP6.1@194.589,-149.962 v1(195.732,-149.962) ; v1@195.643,-150.051 ccw(c195.426,-150.268) 195.426,-149.962 ccw(c195.426,-149.655) v1@195.643,-149.872 ; v1(204.064,-152.933) 204.303,-152.694 U54.31@204.303,-151.735
  Bottom Layer w0.254: C156.1@196.845,-150.119 cw(c196.464,-150.5) 197.002,-150.5 cw(c197.541,-150.5) C156.1@197.16,-150.119 ; C156.1@197.002,-149.962 197.002,-151.181 197.841,-152.019 203.149,-152.019 v1(204.064,-152.933) ; v1@203.937,-152.933 ccw(c203.63,-152.933) 203.847,-152.717 ccw(c204.064,-152.5) v1@204.064,-152.806
  Bottom Layer w0.508: U56.6@195.027,-150.023 196.941,-150.023 C156.1@197.002,-149.962 ; 196.548,-150.023 ccw(c196.548,-149.583) C156.1@196.86,-149.894